# Altium PCB Route_Guide_and_Tuning.PcbDoc (part 1 of 8)
Units mil, origin at the board's own origin, x right, y up, seen from the top; angles counter-clockwise.
Board outline 3600 x 2300 mil, 14 copper layers (L1 TOP, L2_G, L3 SIG, L4_G, L4 SIG, L6_P, L7_G, L10_P, L11_P, L7 SIG, L13_P, L8 SIG, L15_G, L10 BOT), stack 89.291 mil thick; 4 components, 1934 nets, 2174 pads, 2165 vias.
Unrouted connection lines stored in the file: 123.
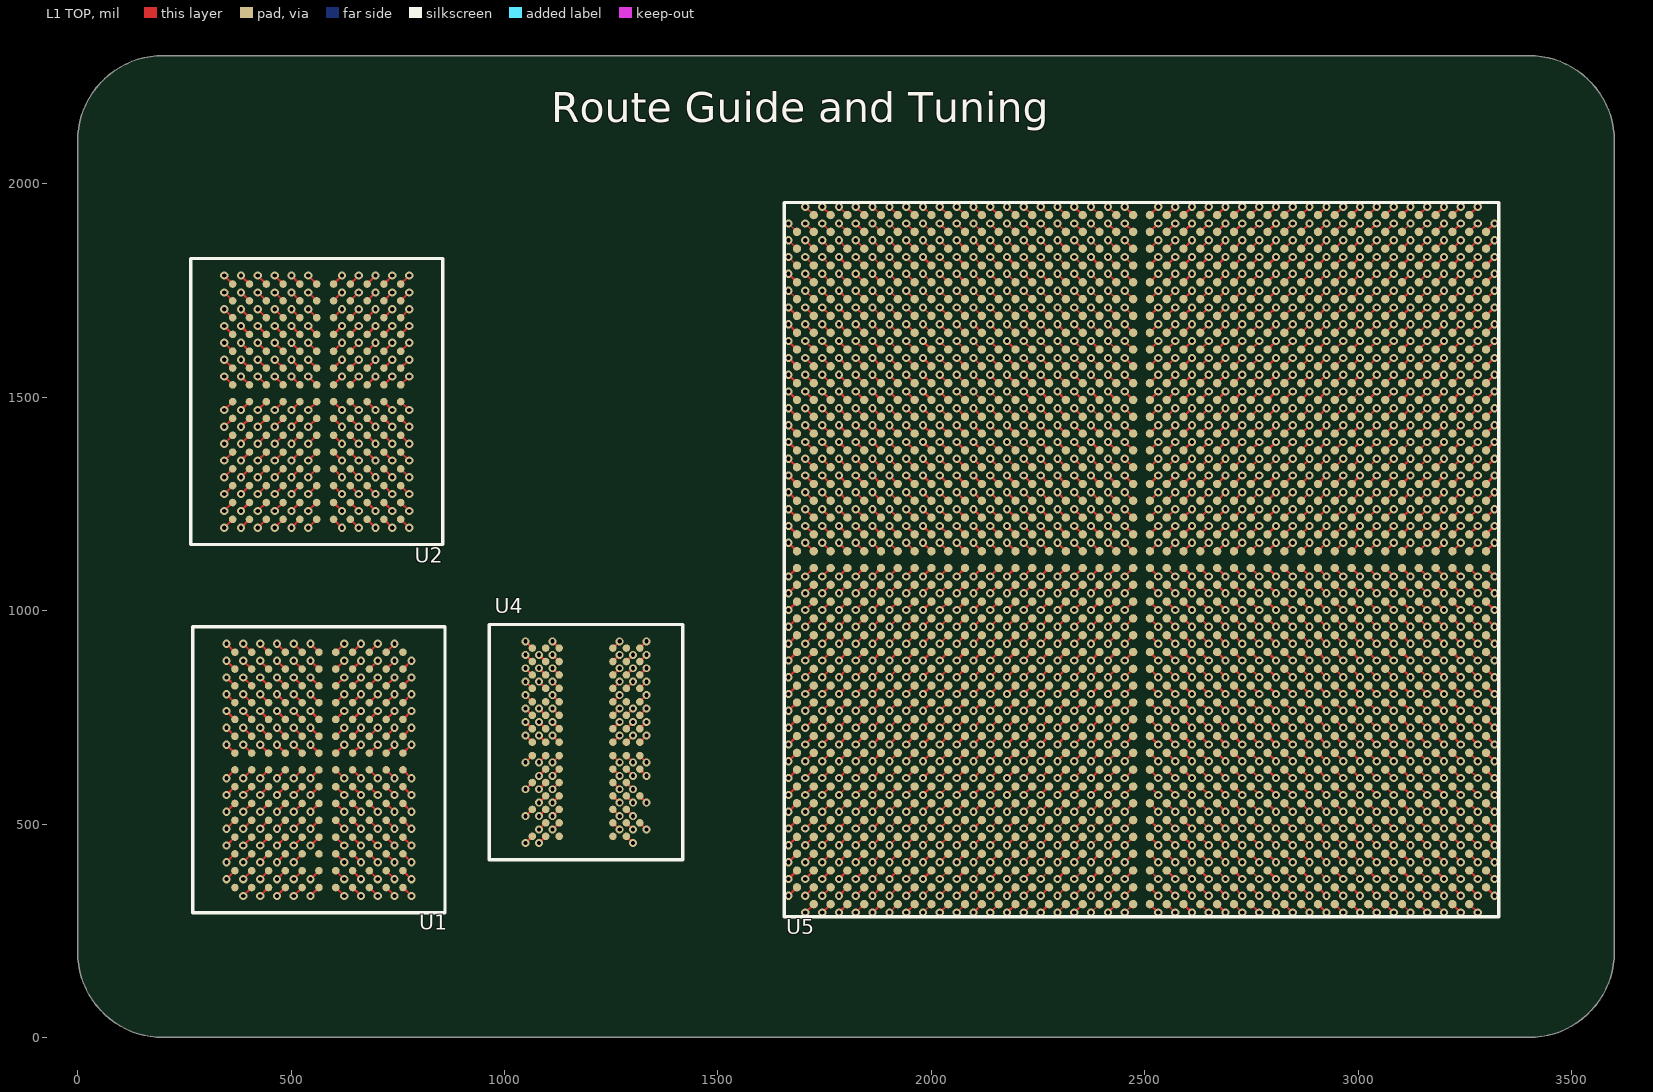
[diagram p0: L1 TOP view]
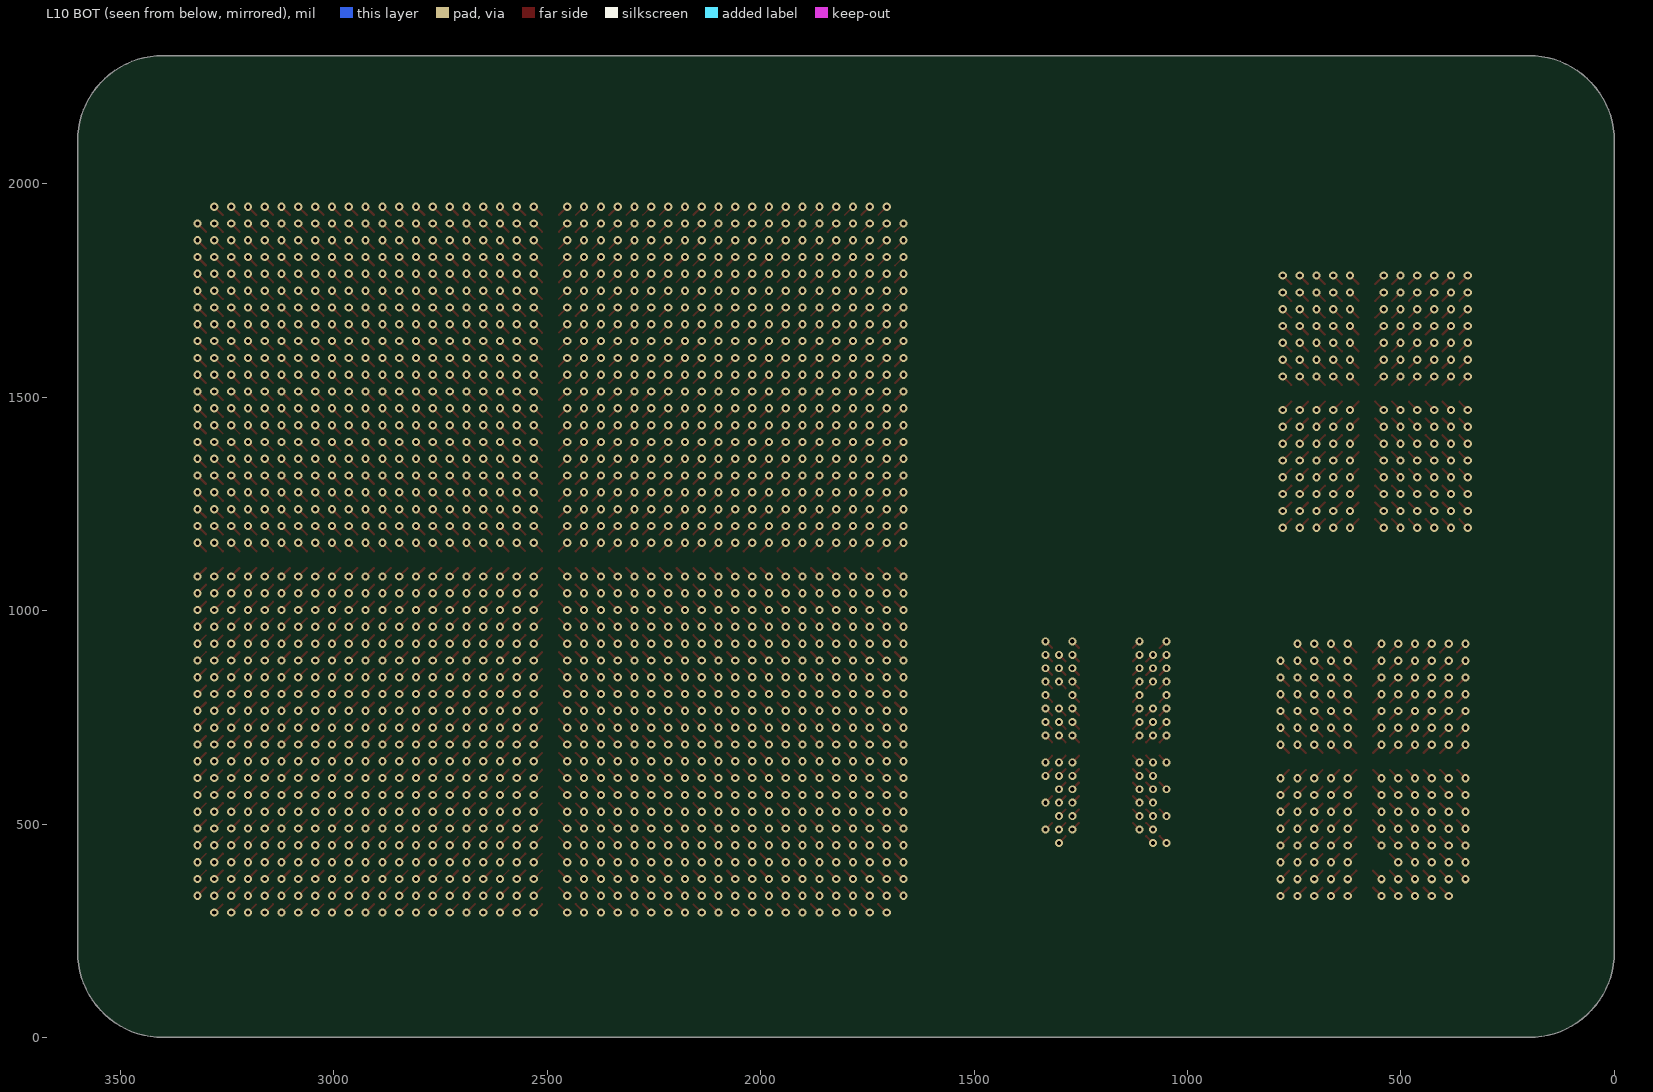
[diagram p1: L10 BOT view, seen from below]
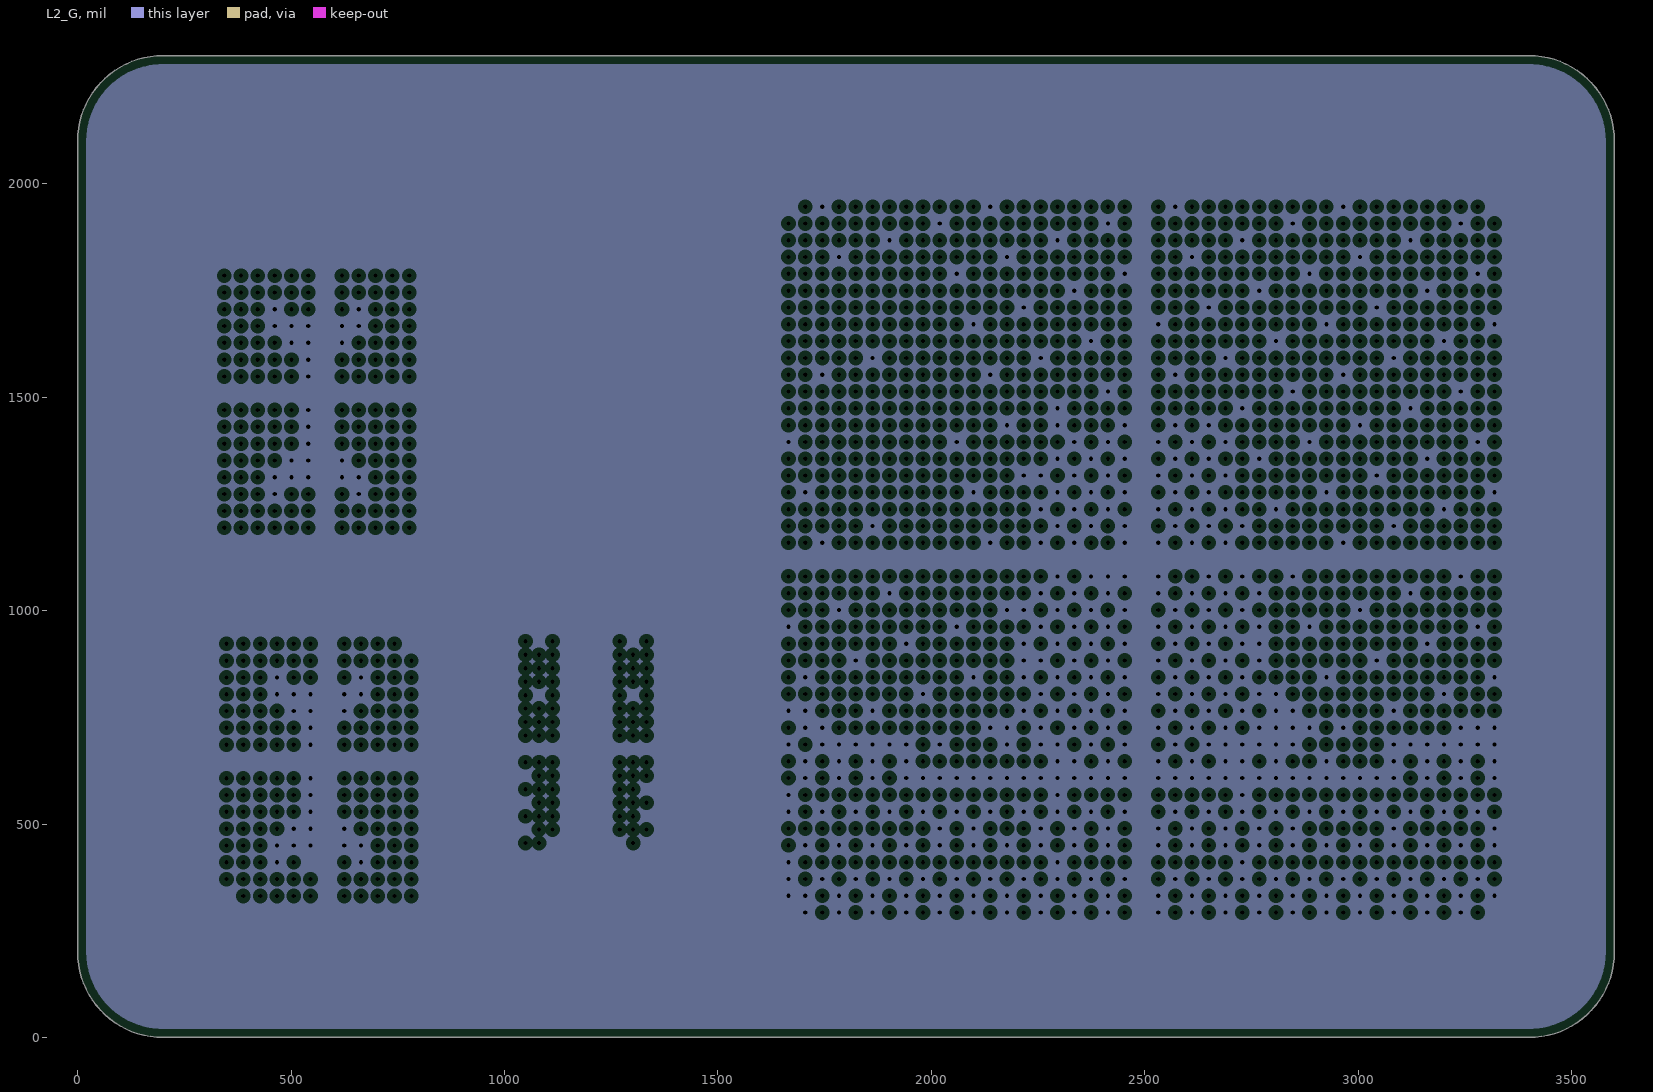
[diagram p2: L2_G, clearances drawn from the general rule]
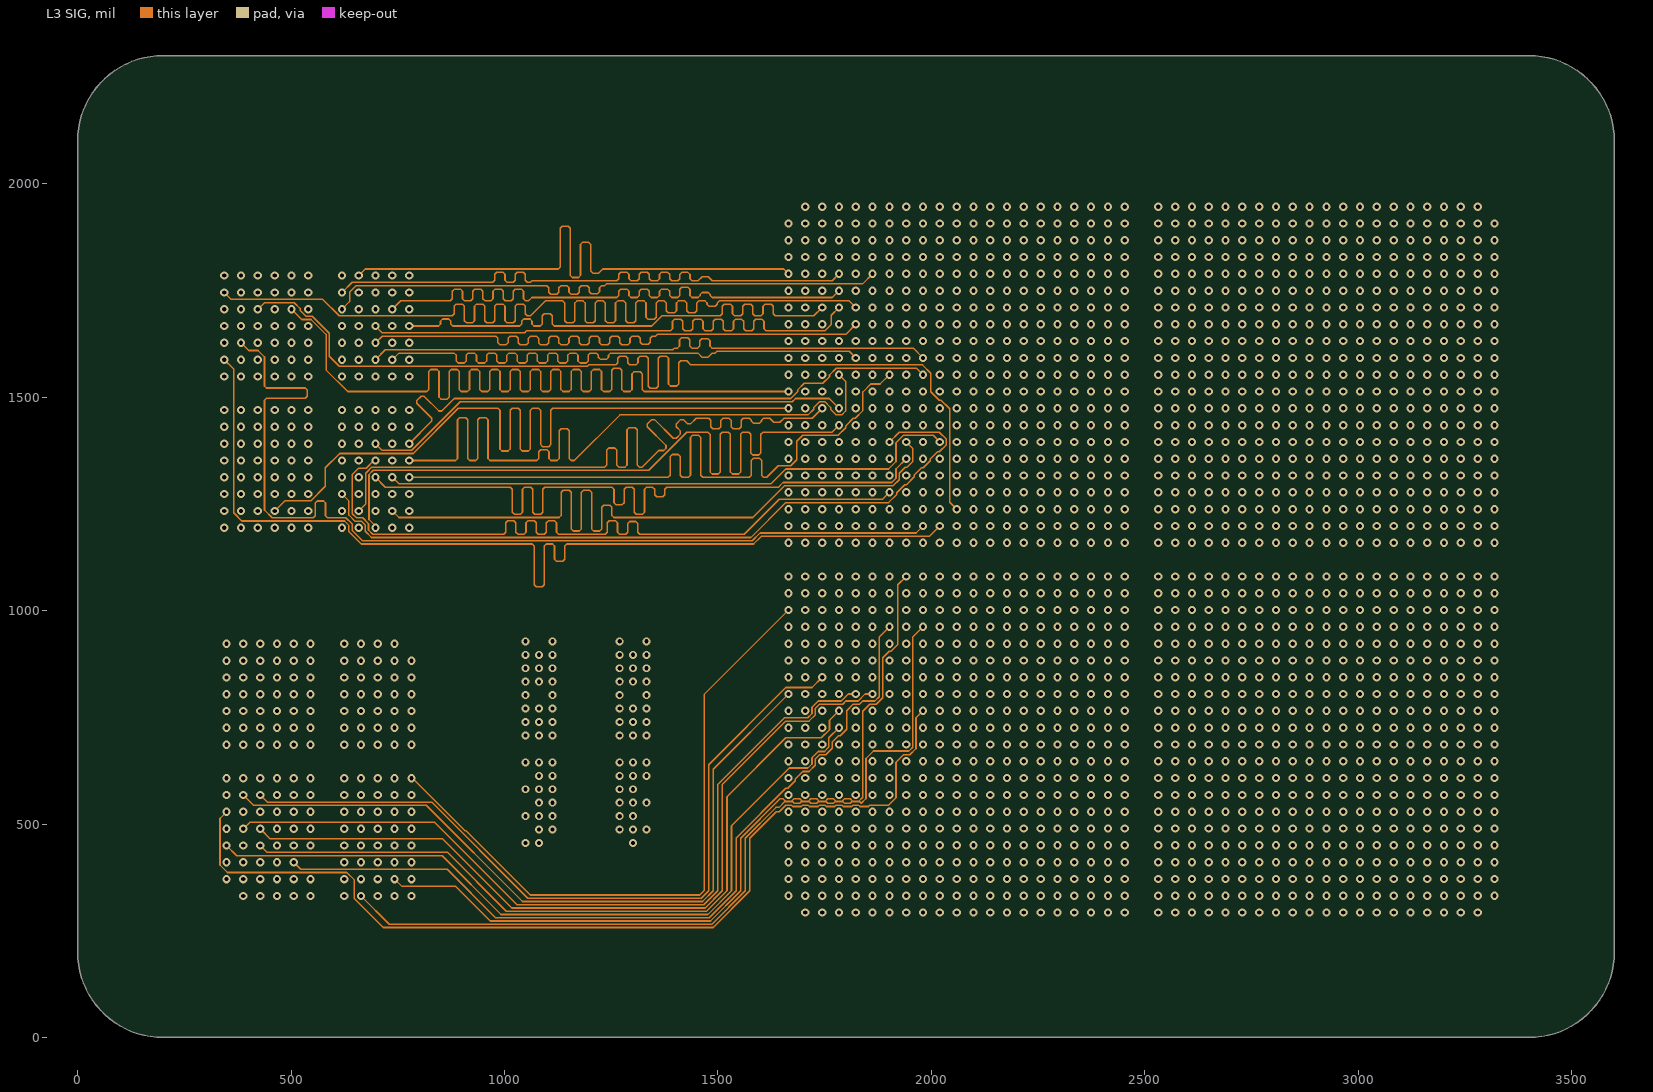
[diagram p3: L3 SIG]
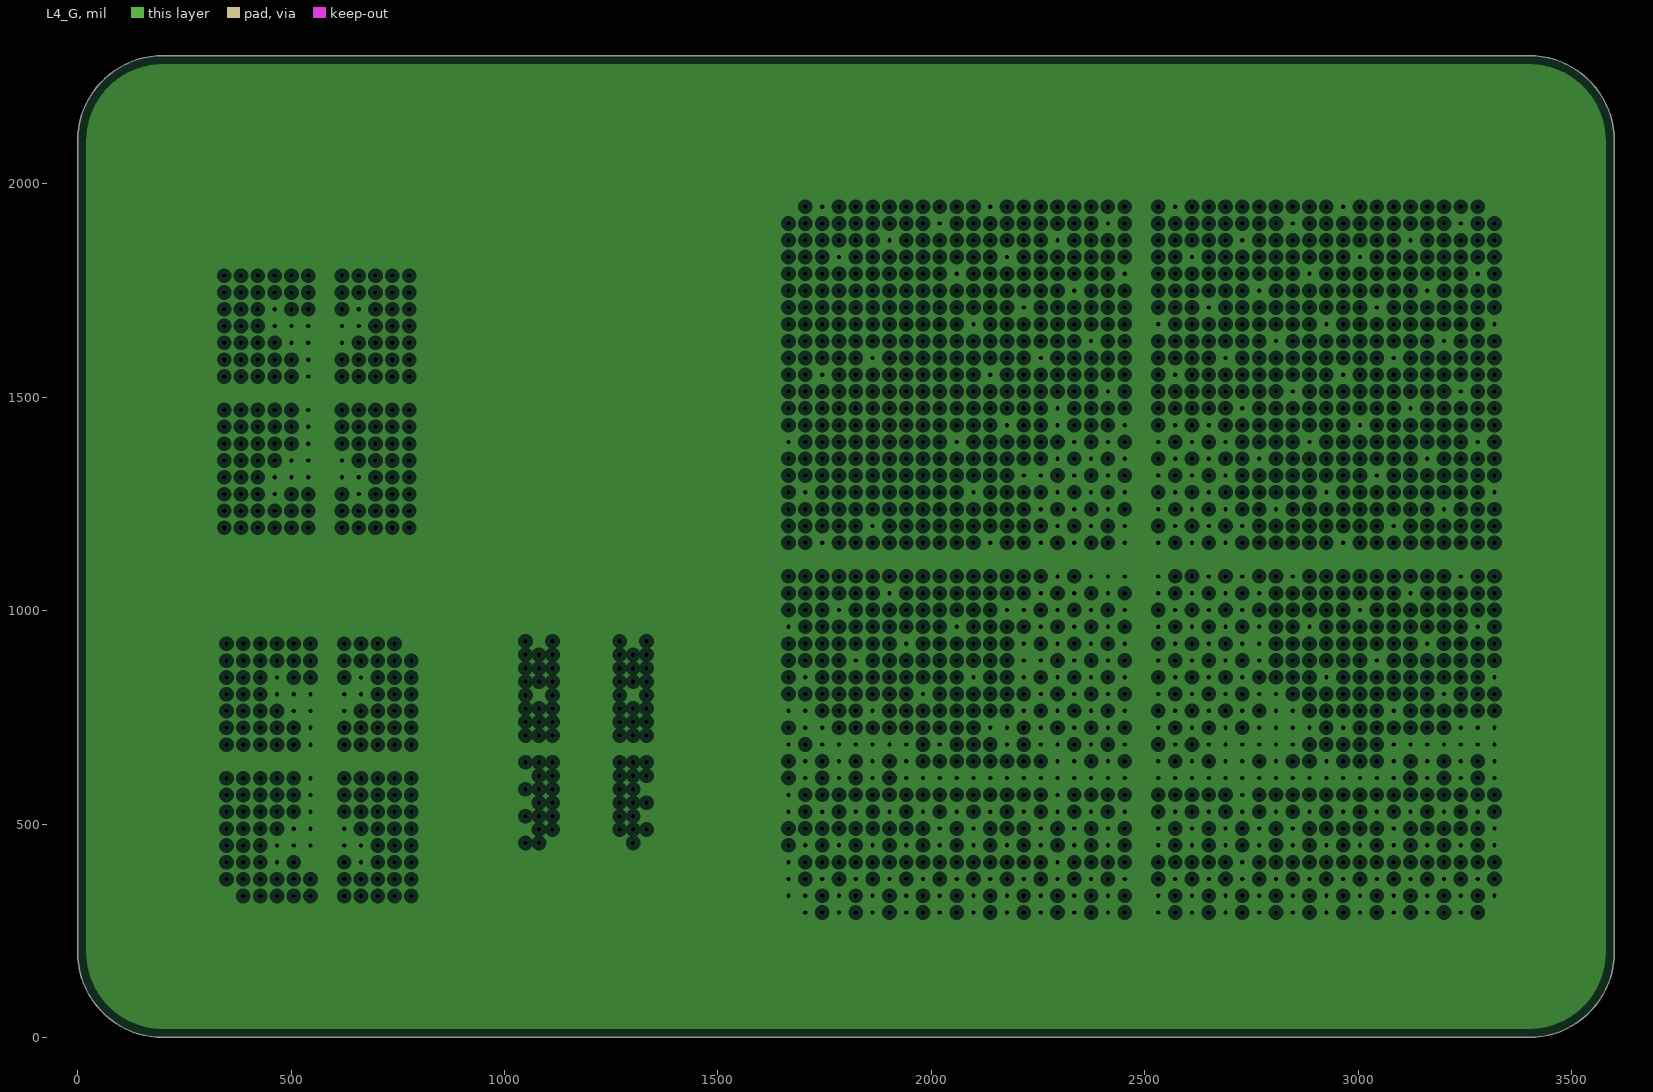
[diagram p4: L4_G, clearances drawn from the general rule]
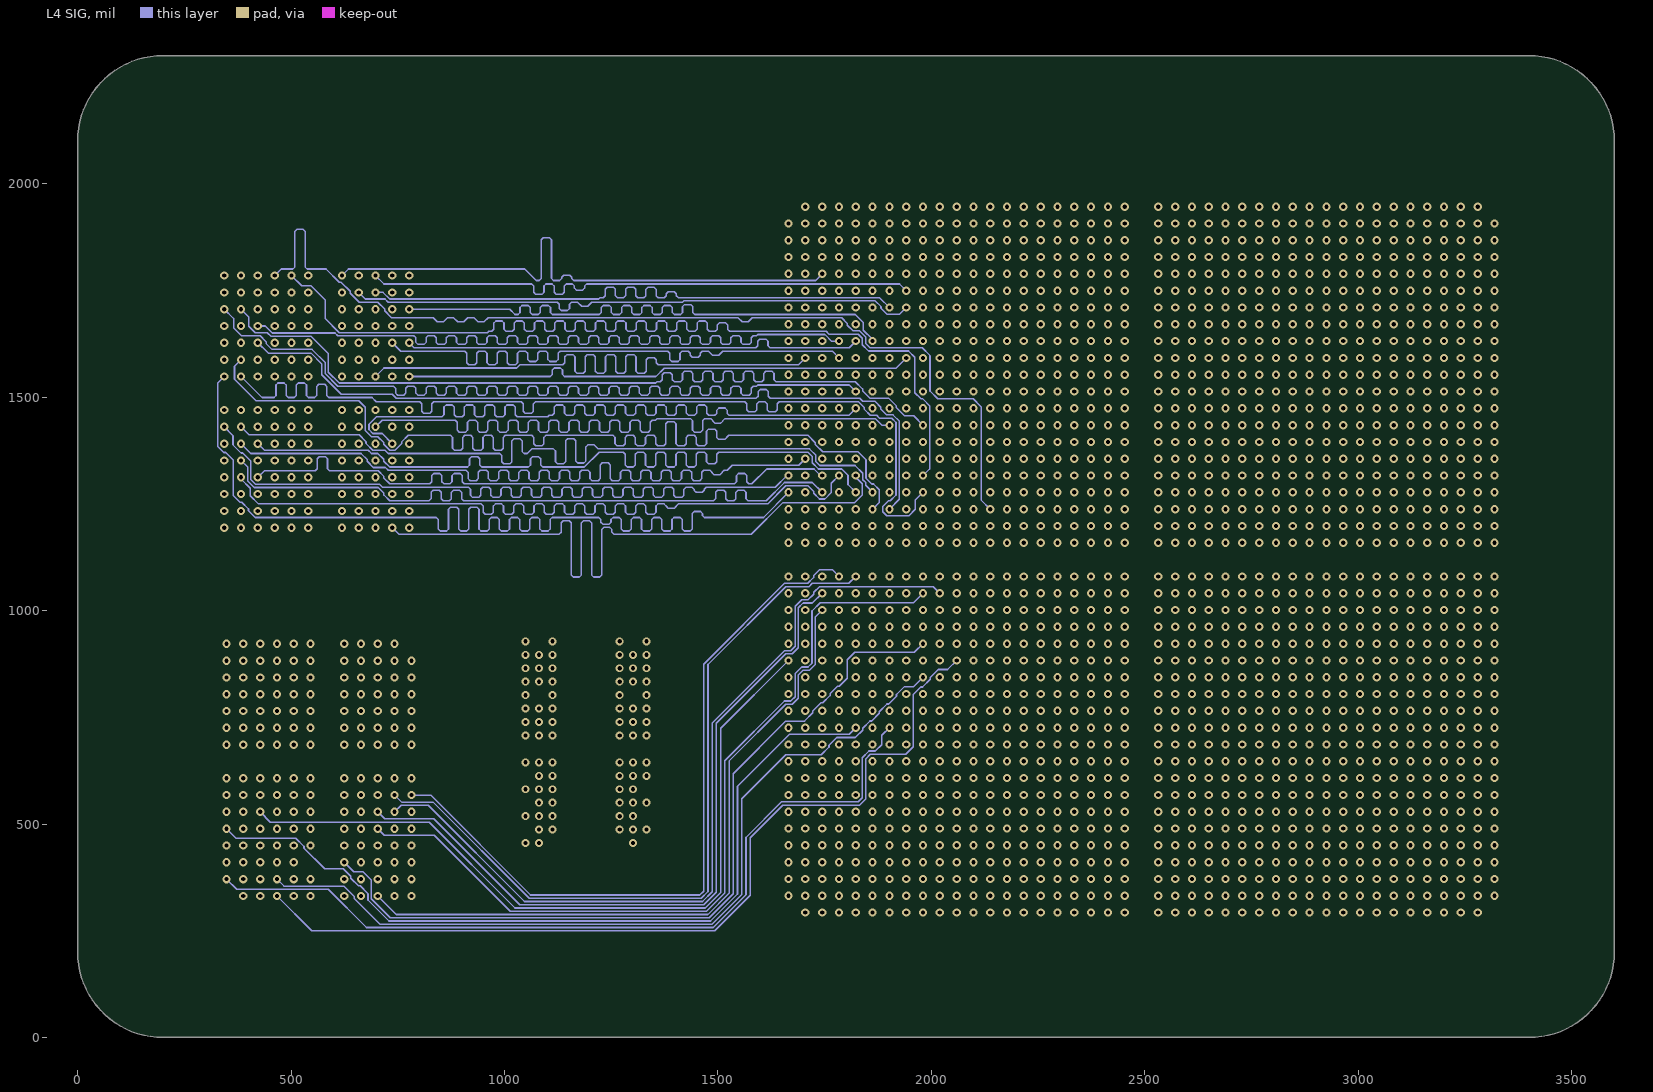
[diagram p5: L4 SIG]
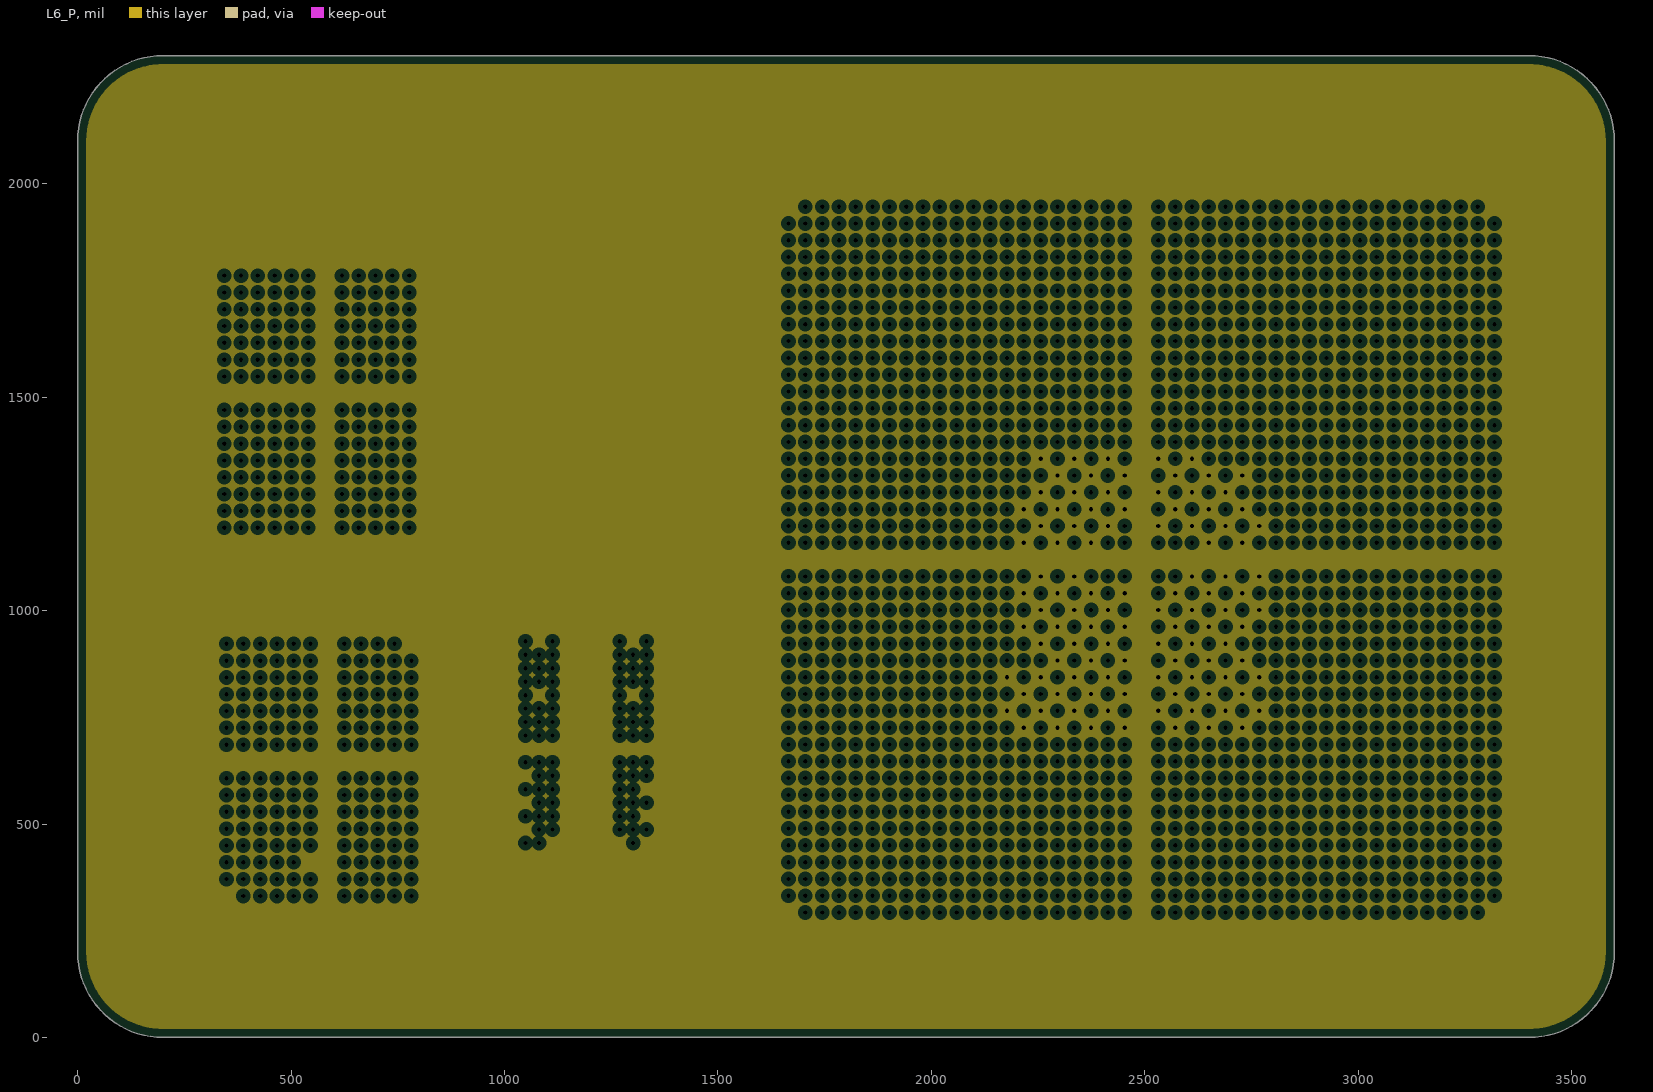
[diagram p6: L6_P, clearances drawn from the general rule]
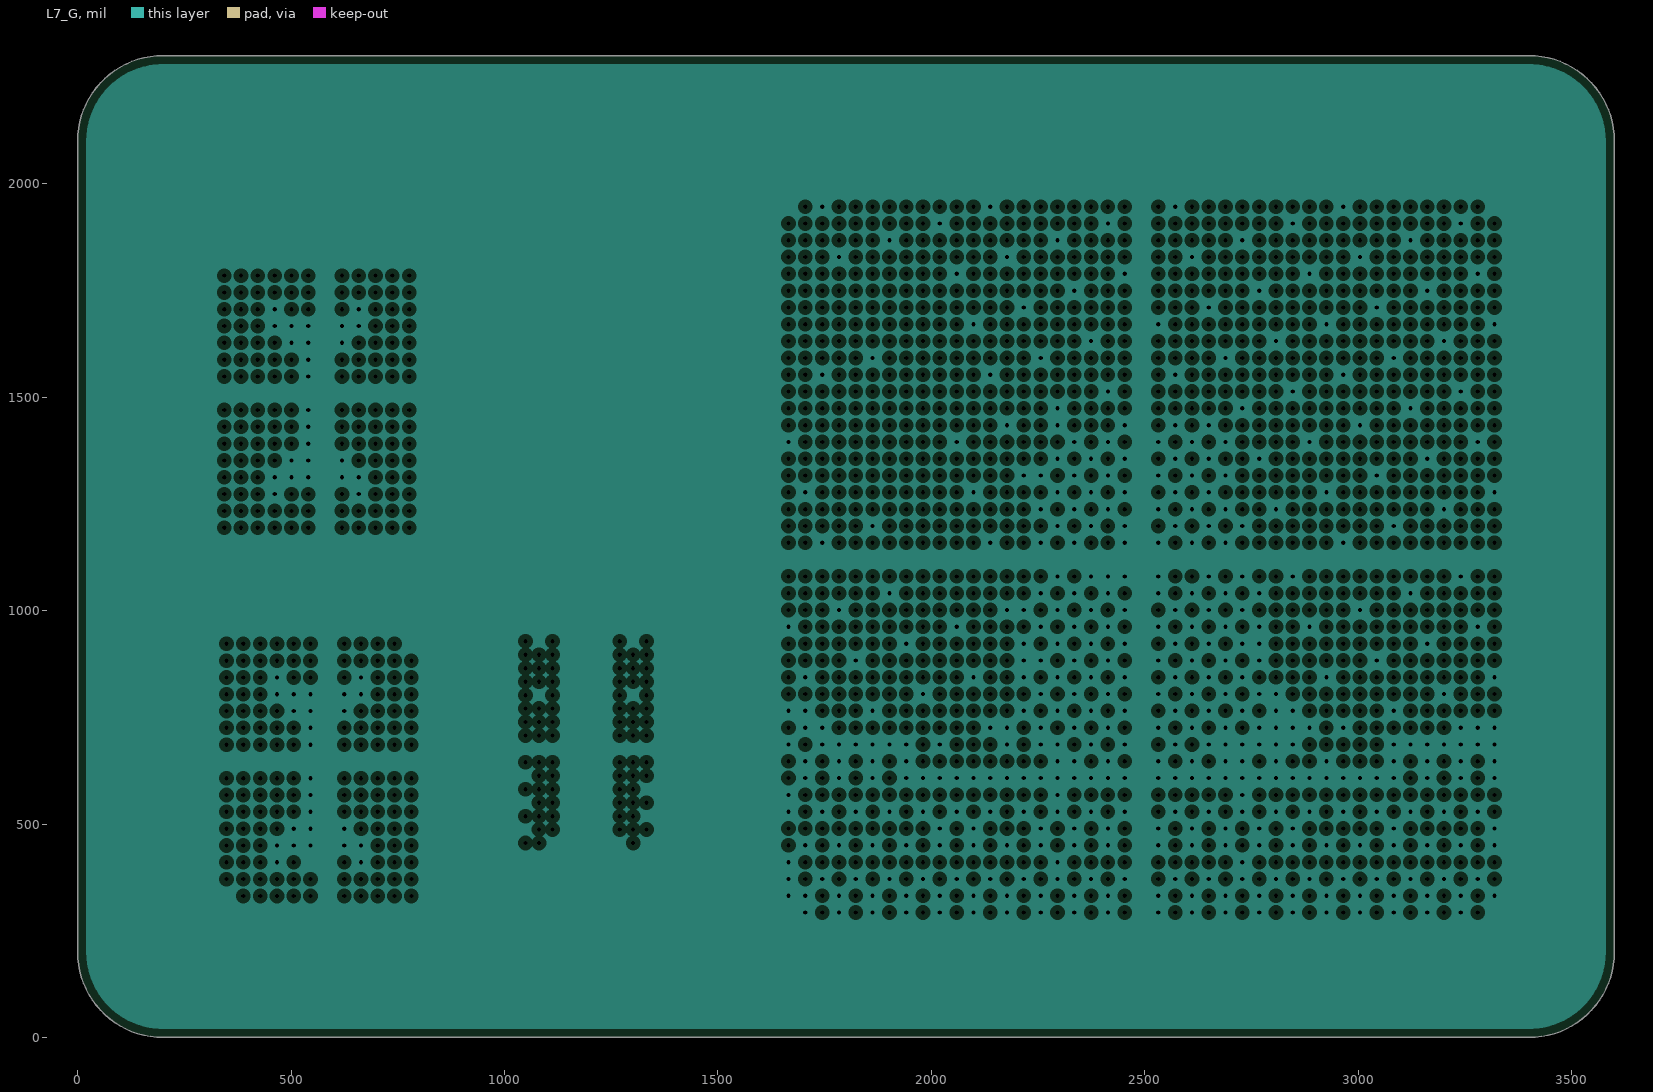
[diagram p7: L7_G, clearances drawn from the general rule]
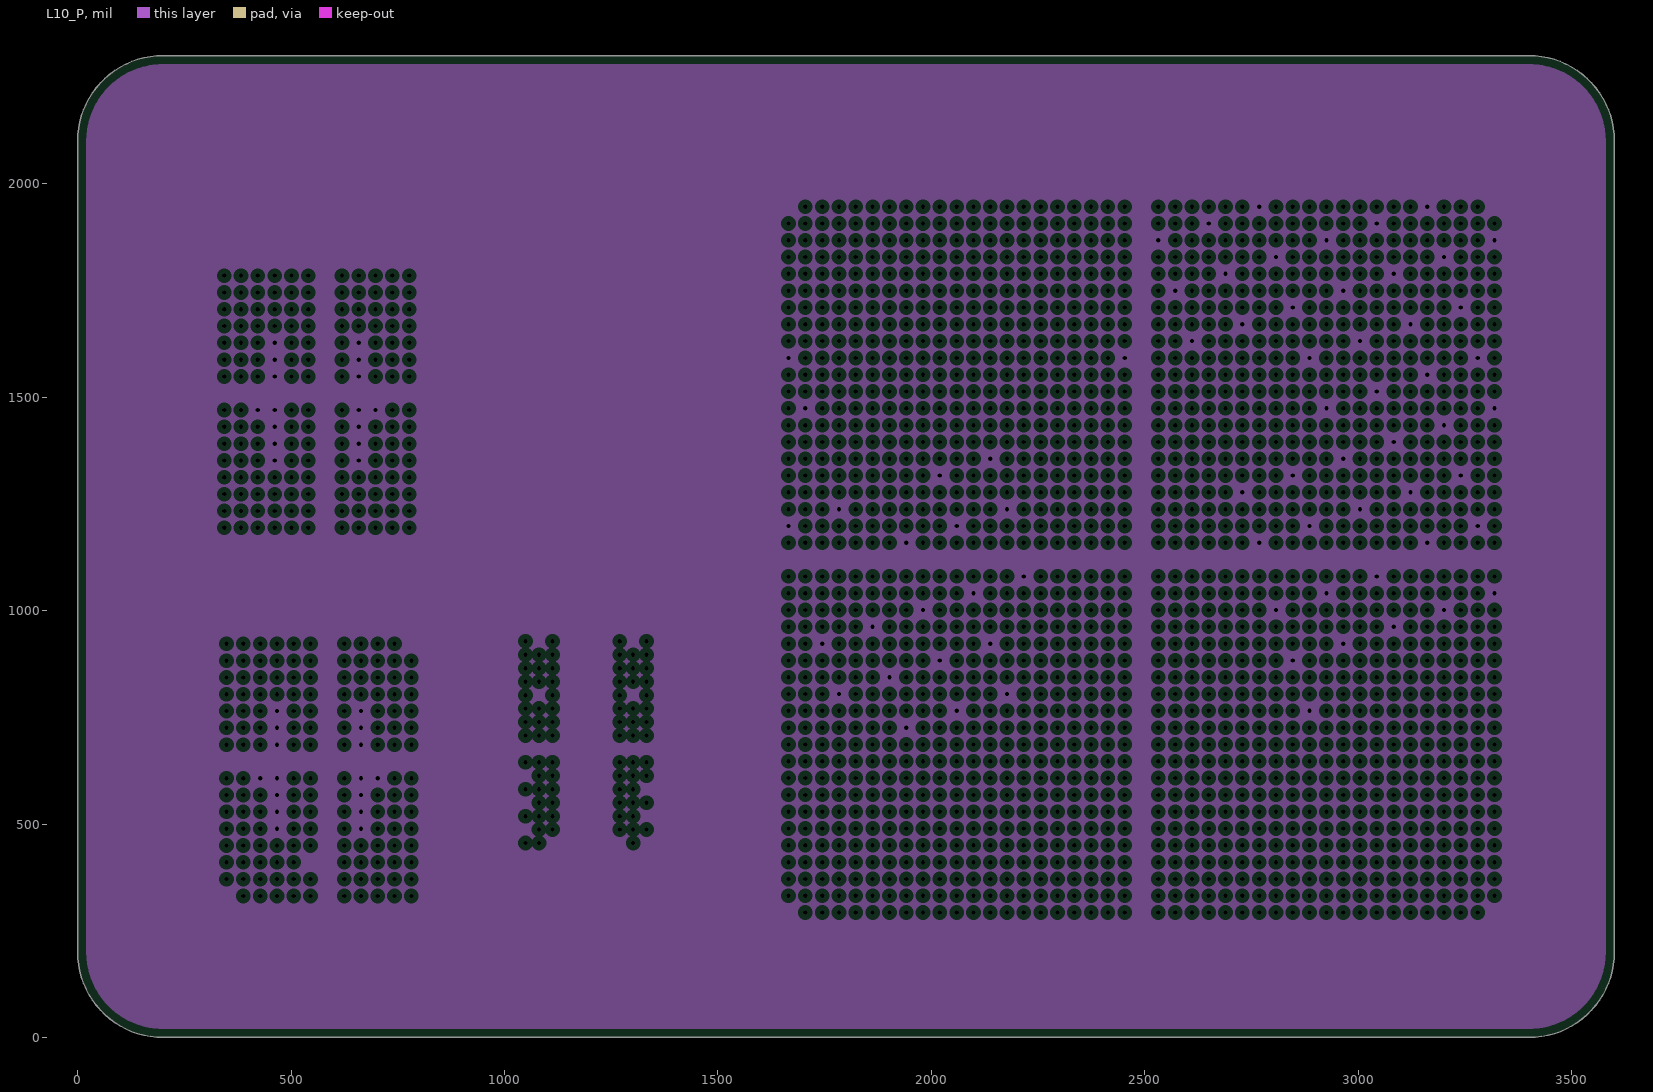
[diagram p8: L10_P, clearances drawn from the general rule]
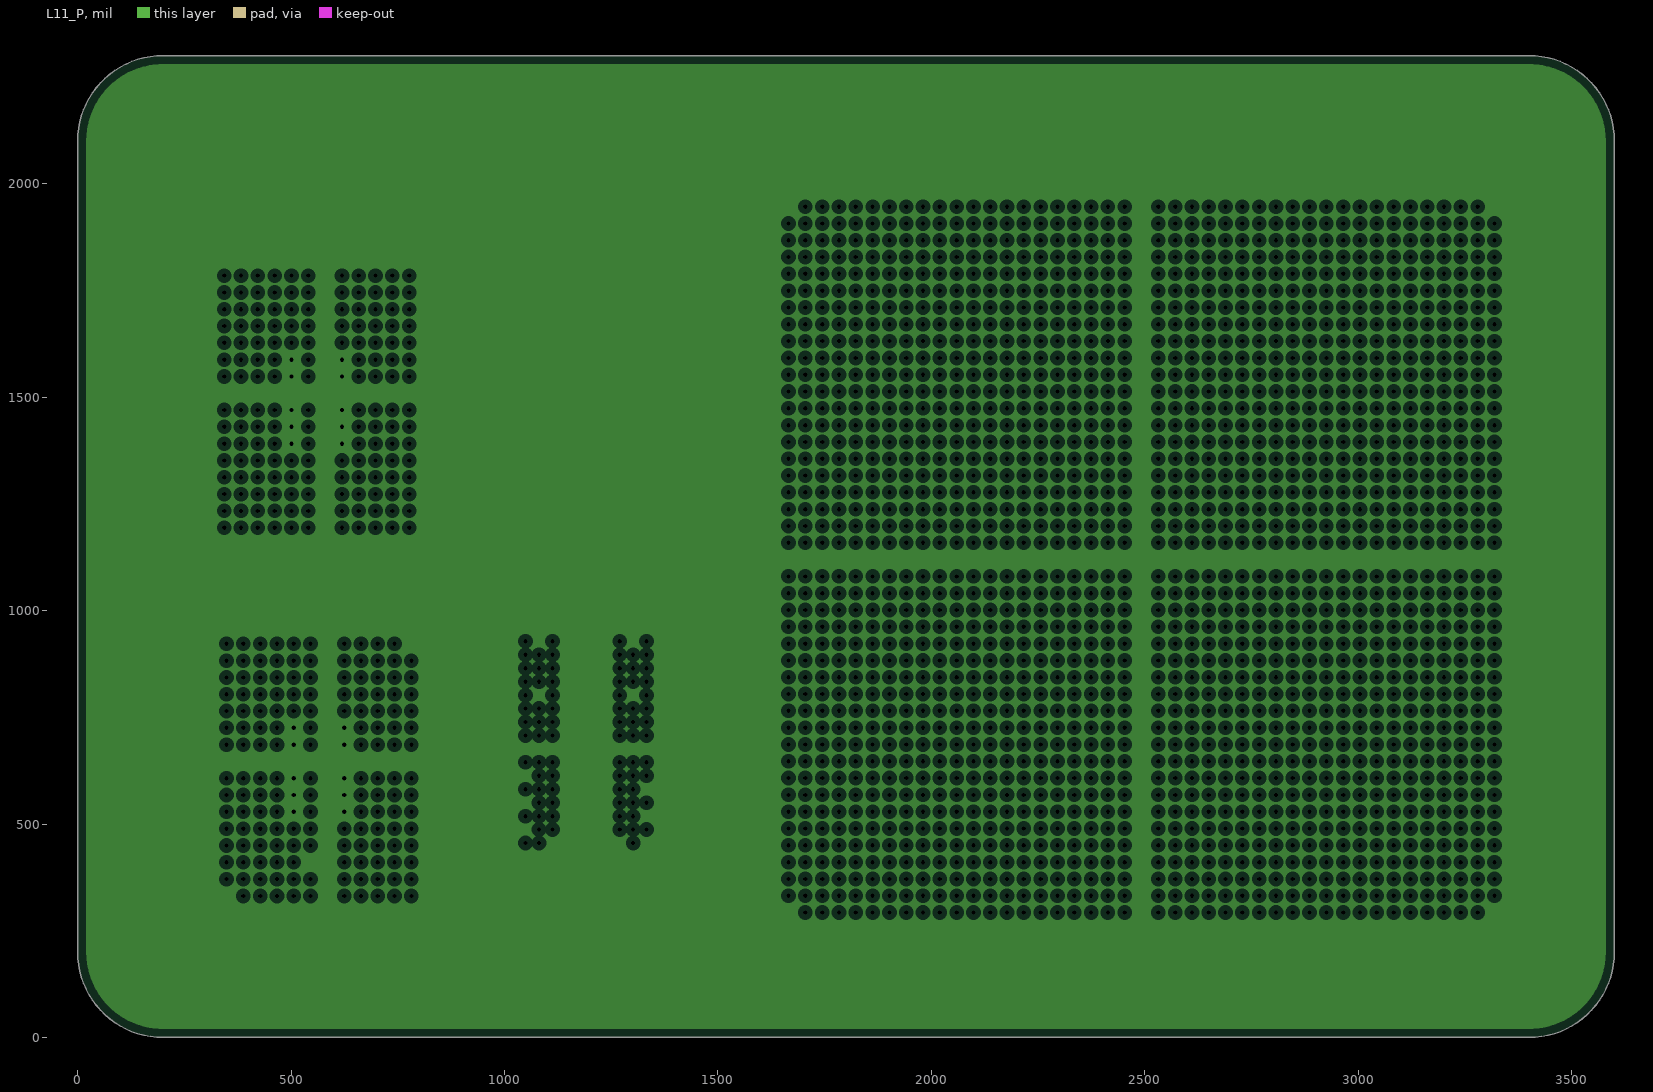
[diagram p9: L11_P, clearances drawn from the general rule]
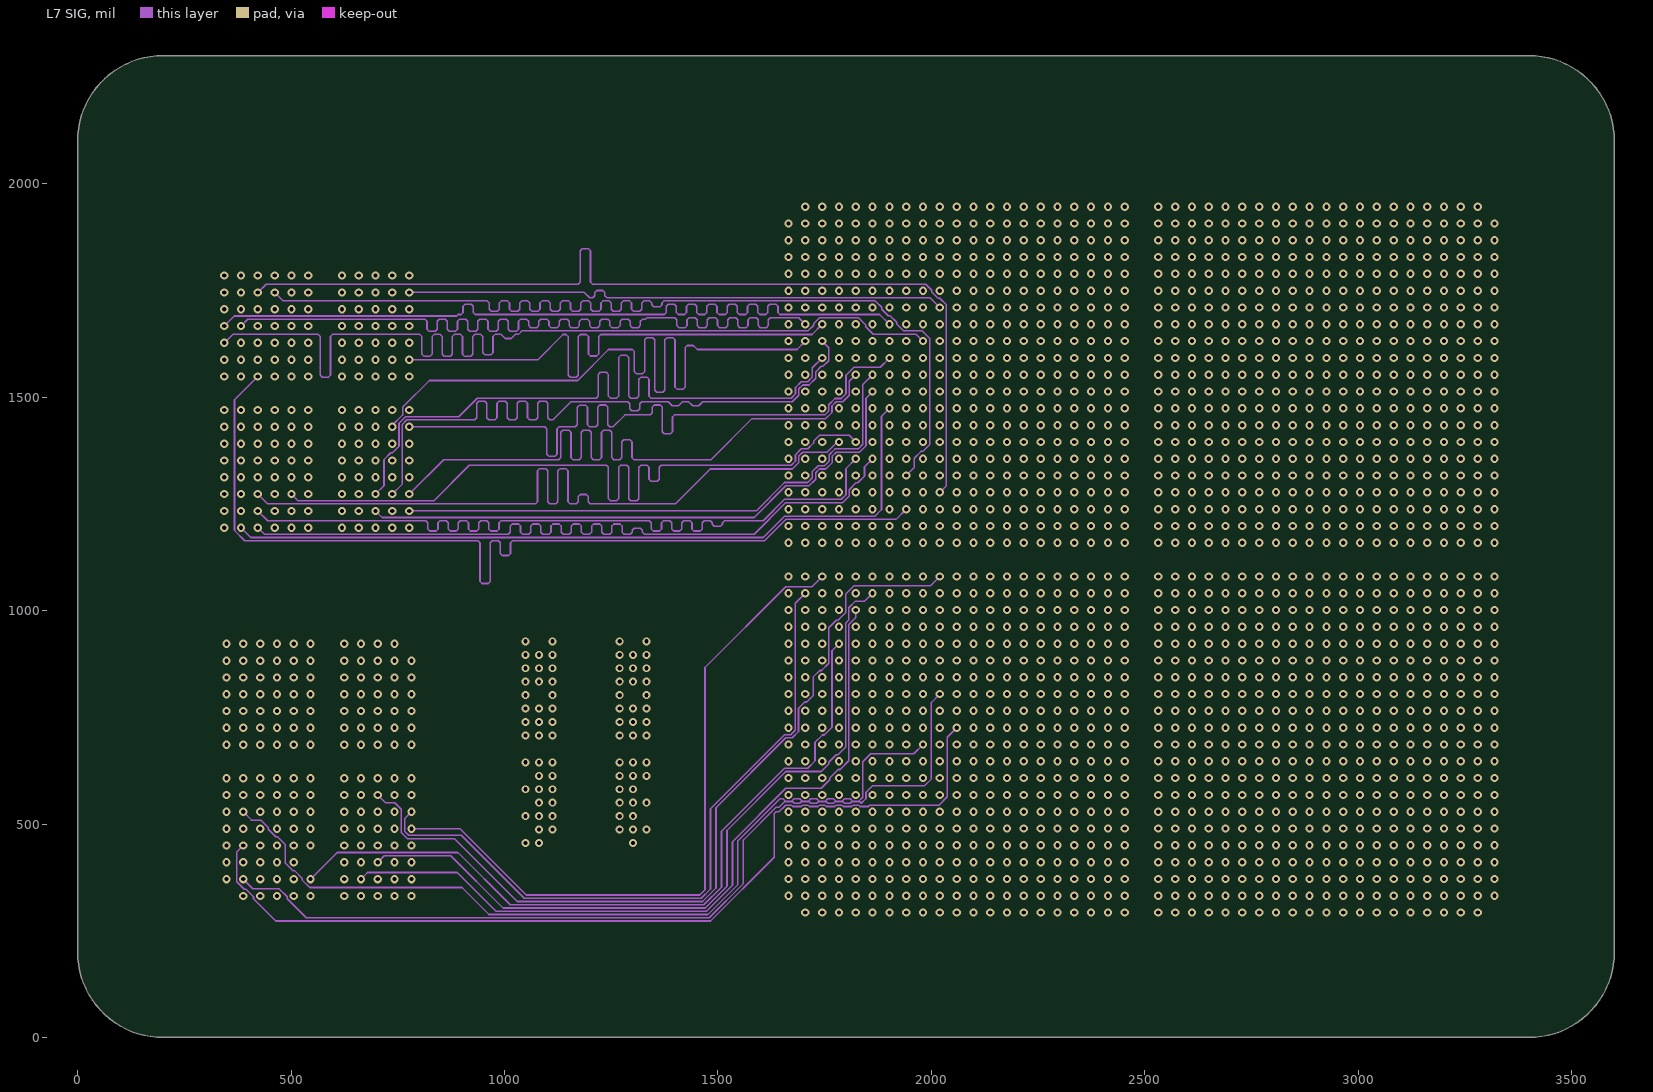
[diagram p10: L7 SIG]
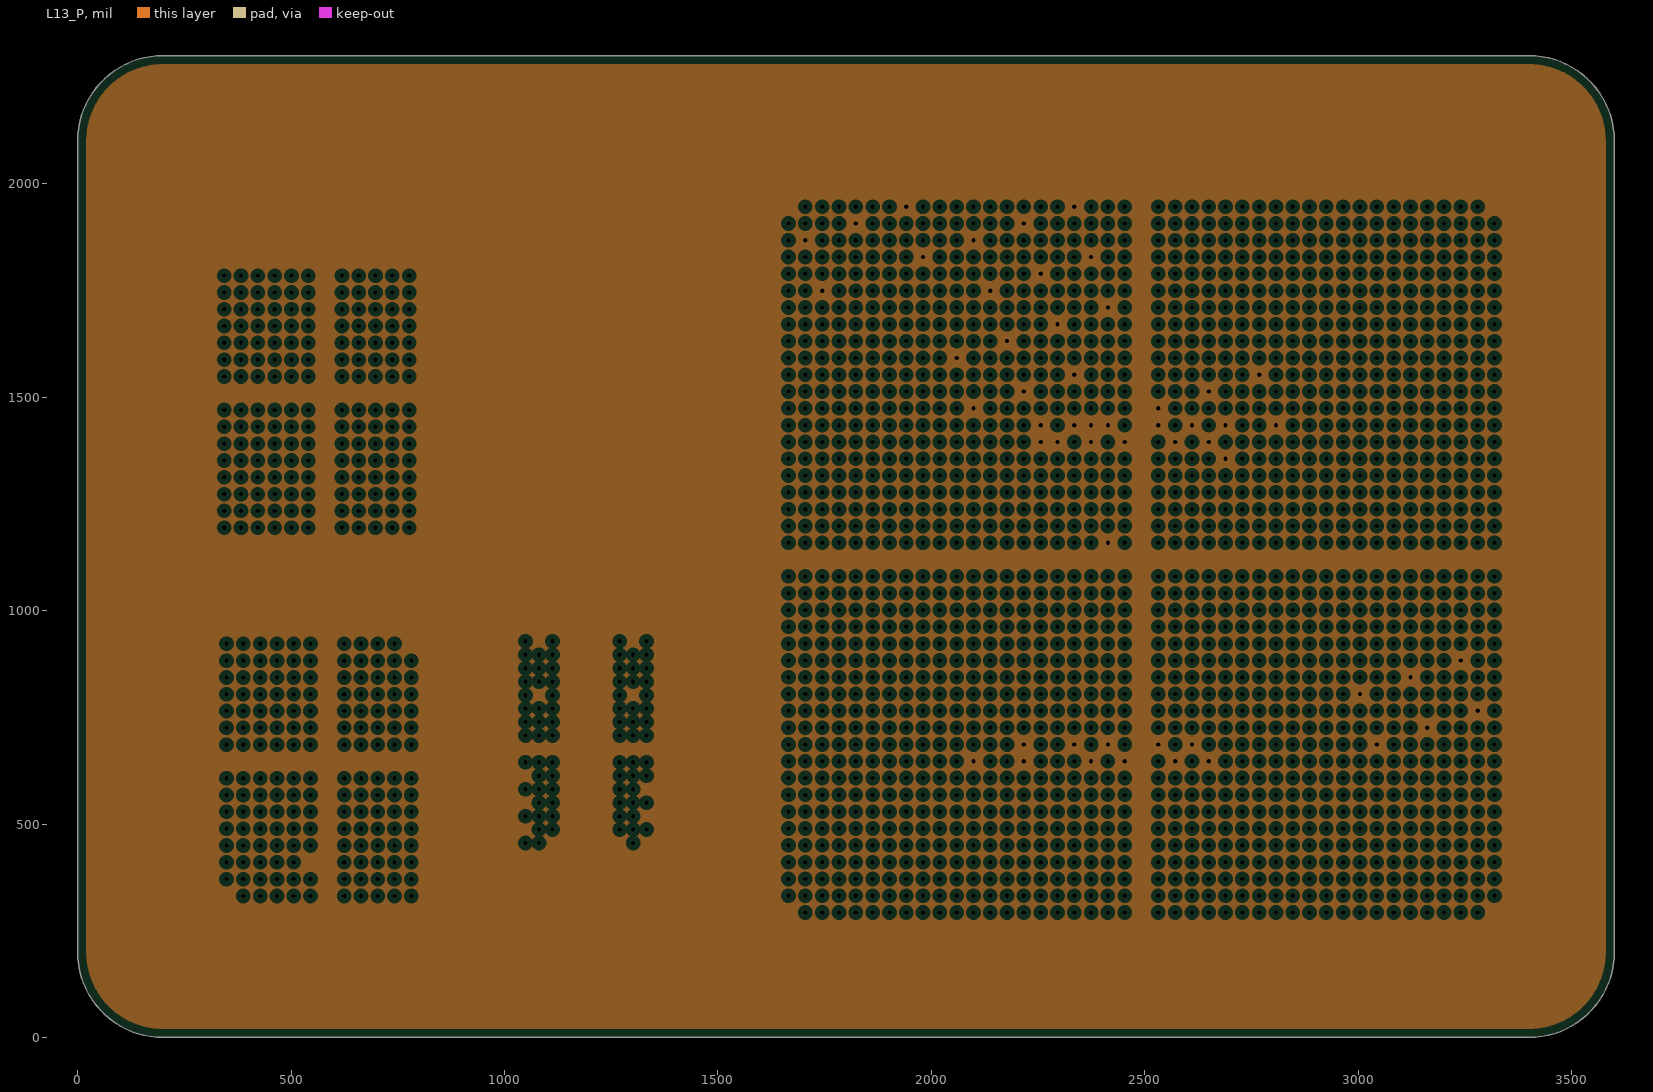
[diagram p11: L13_P, clearances drawn from the general rule]
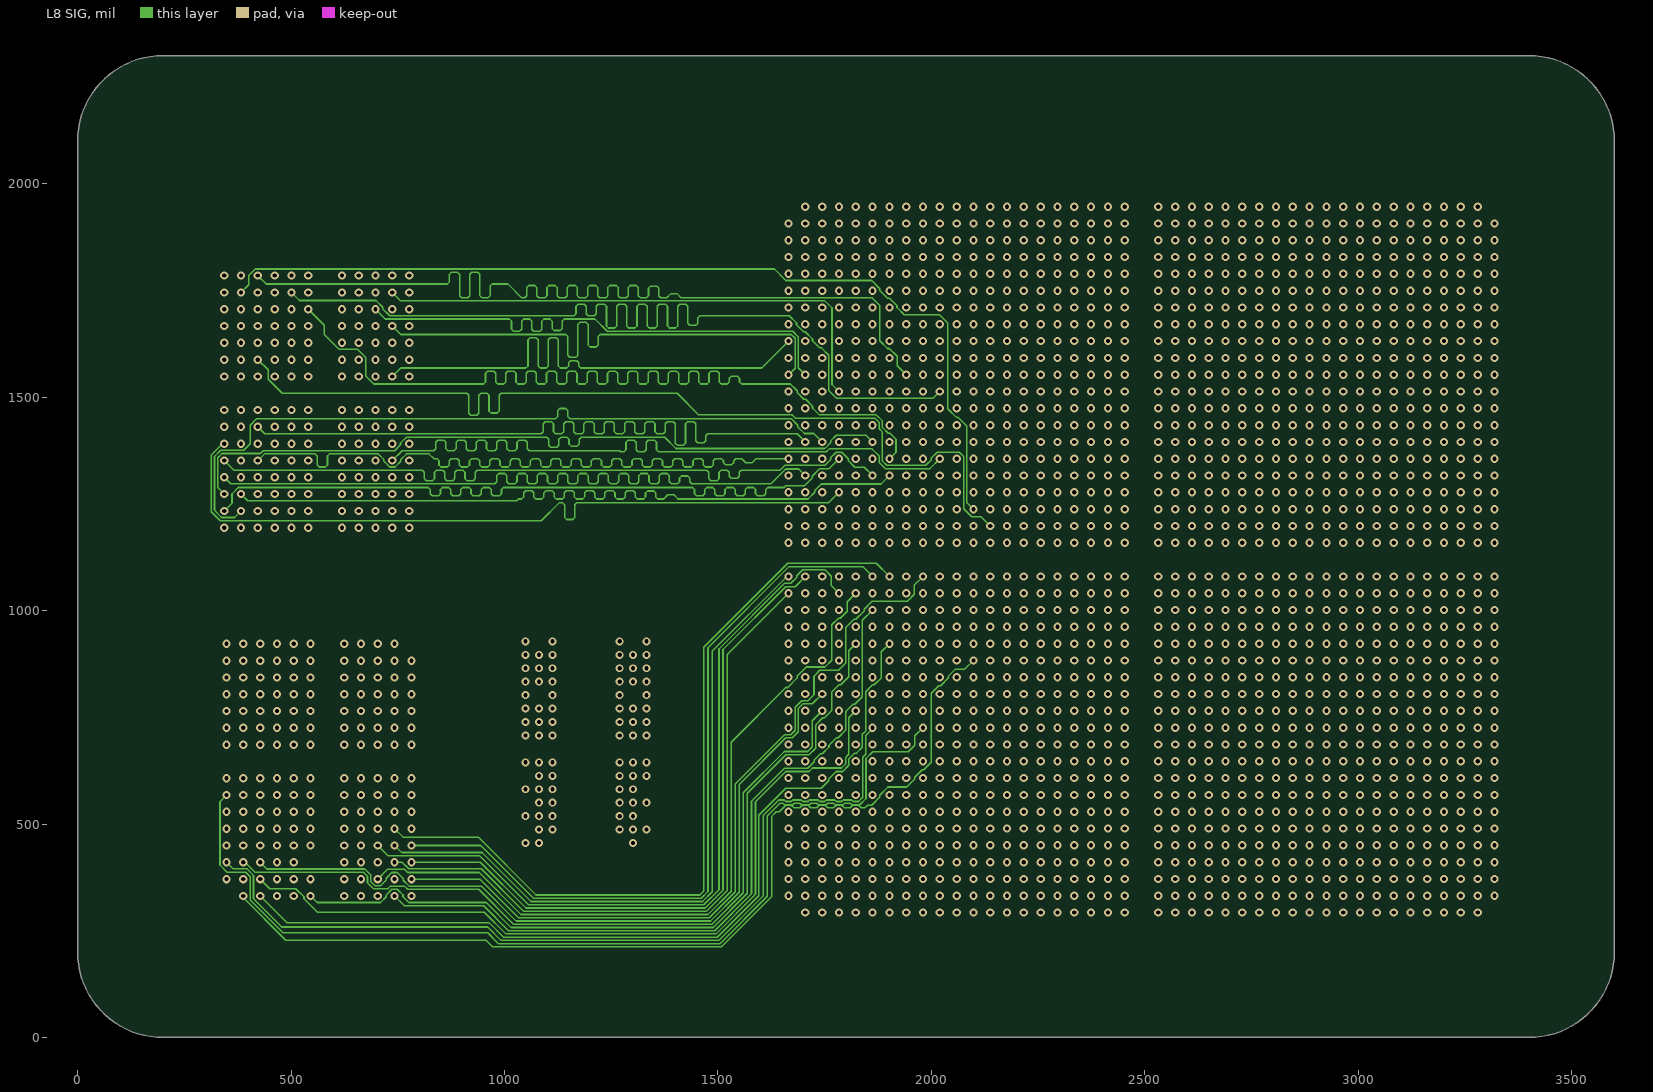
[diagram p12: L8 SIG]
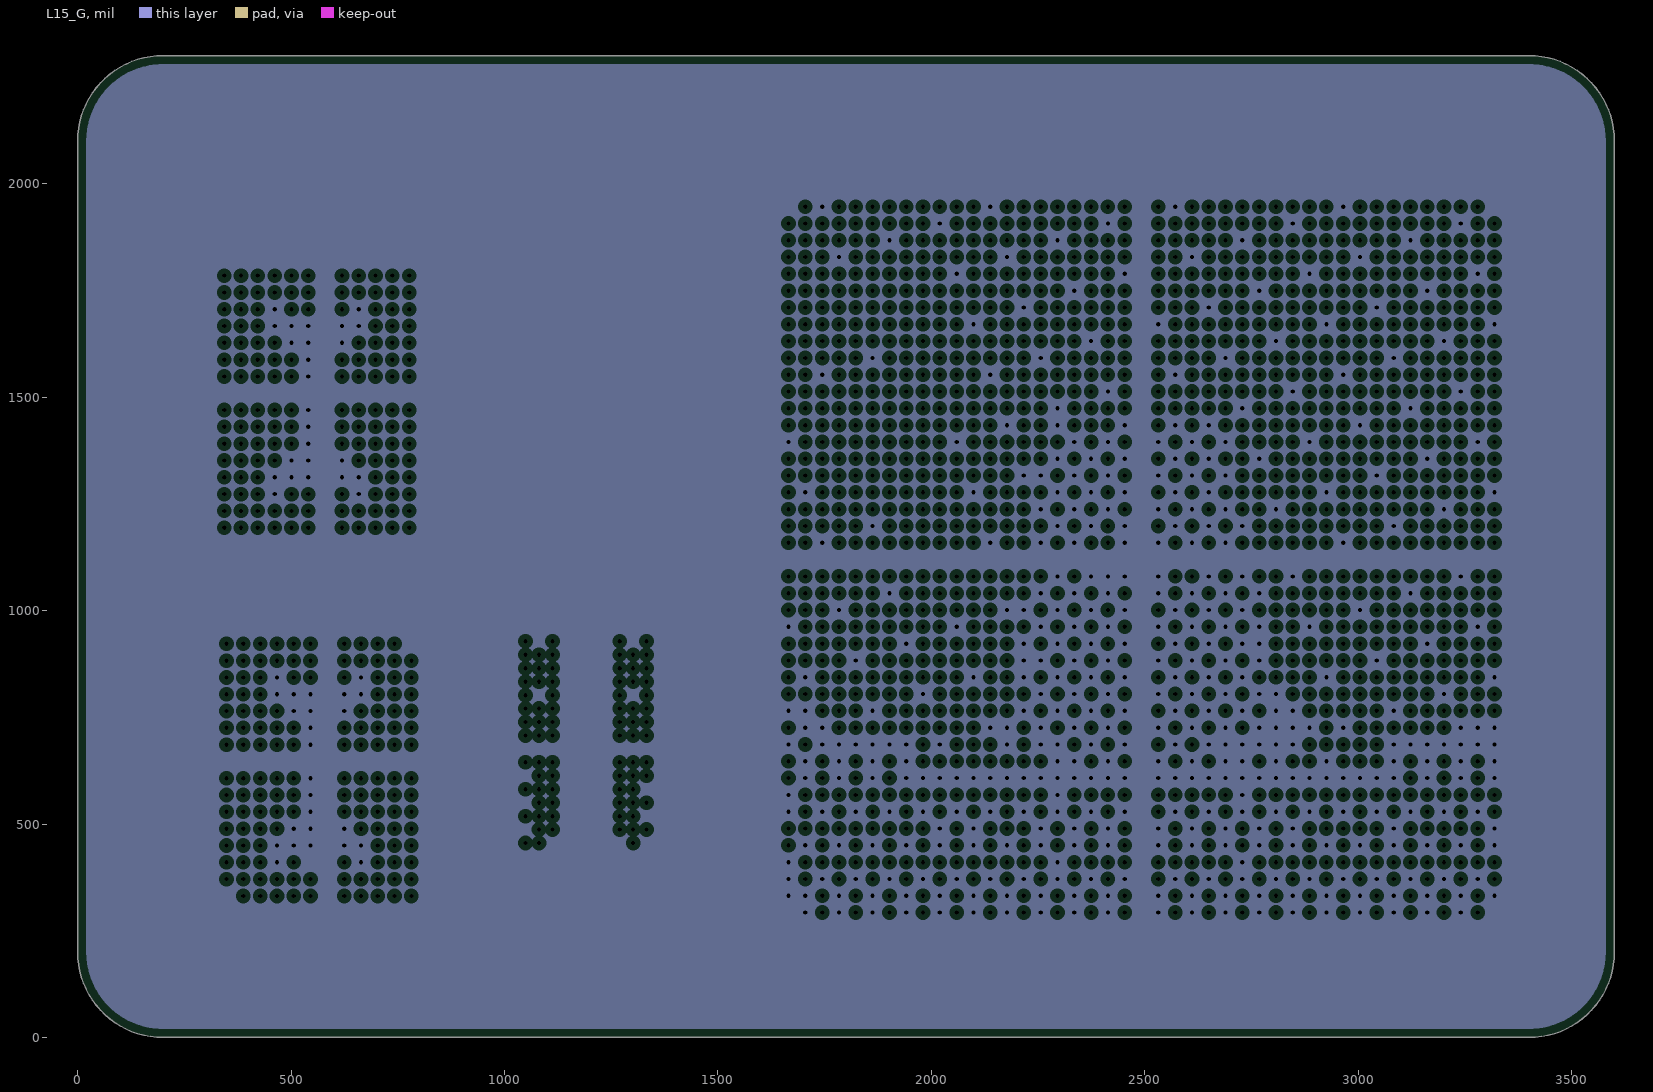
[diagram p13: L15_G, clearances drawn from the general rule]

## Layer stack, top to bottom
Top Solder: solder mask 0.4, Solder Resist, Dk 3.5
L1 TOP: signal copper 0.685
Dielectric1: prepreg 3, FR-4, Dk 4.2
L2_G: plane copper 0.6752, net GND
Dielectric9: core 5, FR-4, Dk 4.2
L3 SIG: signal copper 0.6752
Dielectric2: prepreg 5, FR-4, Dk 4.8
L4_G: plane copper 0.6752, net GND
Dielectric8: core 5, FR-4, Dk 4.2
L4 SIG: signal copper 0.6752
Dielectric3: prepreg 5, FR-4, Dk 4.2
L6_P: plane copper 1.3701, net 1V0
Dielectric10: core 5, FR-4, Dk 4.2
L7_G: plane copper 1.3701, net GND
Dielectric11: prepreg 4, FR-4, Dk 4.2
L10_P: plane copper 1.3701, net 1V5
Dielectric12: core 10, FR-4, Dk 4.2
L11_P: plane copper 1.3701, net 1V8
Dielectric13: prepreg 5, FR-4, Dk 4.2
L7 SIG: signal copper 0.685
Dielectric6: core 10, FR-4, Dk 4.2
L13_P: plane copper 0.685, net 2V5
Dielectric14: prepreg 5, FR-4, Dk 4.2
L8 SIG: signal copper 0.685
Dielectric7: core 10, FR-4, Dk 4.2
L15_G: plane copper 0.685, net GND
Dielectric15: prepreg 5, FR-4, Dk 4.2
L10 BOT: signal copper 0.685
Bottom Solder: solder mask 0.4, Solder Resist, Dk 3.5

## Board outline
3600,200 3600,2100 ccw(c3400,2100) 3400,2300 200,2300 ccw(c200,2100) 0,2100 0,200 ccw(c200,200) 200,0 3400,0 ccw(c3400,200)

## Design rules (kind name [scope] priority, off if disabled: settings)
AcuteAngle [not isarc] p1: minimum=6.00000000000000E+0001 checktracksonly=FALSE
Clearance Clearance_3.8 [All] p1: gap=3.8 ignorepadtopadclearanceinfootprint=TRUE except(0: Arc-Hole Track-Hole SMDPad-Hole THPad-Hole Via-Hole Fill-Hole Poly-Hole Region-Hole Text-Hole)
DiffPairsRouting [All] p1: maxlimit=10 minlimit=4 mostfreqgap=4 toplayer_minwidth=3.8 toplayer_maxwidth=10 toplayer_prefwidth=3.8 midlayer3_minwidth=3.8 midlayer3_maxwidth=10 midlayer3_prefwidth=3.8 midlayer4_minwidth=3.8 midlayer4_maxwidth=10 midlayer4_prefwidth=3.8 midlayer7_minwidth=3.8 midlayer7_maxwidth=10 midlayer7_prefwidth=3.8 midlayer8_minwidth=3.8 midlayer8_maxwidth=10 midlayer8_prefwidth=3.8 bottomlayer_minwidth=3.8 bottomlayer_maxwidth=10 bottomlayer_prefwidth=3.8 maxuncoupledlength=700
FanoutControl Fanout_Default [All] p5: bgadir=Out bgaviamode=Centered fanoutstyle=BGA fanoutdirection=Alternating viagrid=1 // Fanout_Default (Default Rule)
Height [All] p1: minheight=0 maxheight=1181.1 prefheight=500
HoleSize [All] p1: absolutevalues=TRUE maxlimit=150 minlimit=10 maxpercent=80.000 minpercent=20.000
MatchedLengths MatchedLengths_4 [InNetClass('Net Class 4')] p1: tolerance=50 checknetsindiffpair=FALSE checkdiffpairvsdiffpair=TRUE checkxsignals=TRUE checkothers=TRUE
MatchedLengths MatchedLengths_3 [InNetClass('Net Class 3')] p2: tolerance=50 checknetsindiffpair=FALSE checkdiffpairvsdiffpair=TRUE checkxsignals=TRUE checkothers=TRUE
MatchedLengths MatchedLengths_2 [InNetClass('Net Class 2')] p3: tolerance=50 checknetsindiffpair=FALSE checkdiffpairvsdiffpair=TRUE checkxsignals=TRUE checkothers=TRUE
MatchedLengths MatchedLengths_1 [InNetClass('Net Class 1')] p4: tolerance=50 checknetsindiffpair=FALSE checkdiffpairvsdiffpair=TRUE checkxsignals=TRUE checkothers=TRUE
MinimumAnnularRing [All] p1: minimumring=4.05
MinimumSolderMaskSliver [All] p1: minsoldermaskwidth=2
PlaneClearance PlaneClearance_routingvia [All] p1: clearance=12.2
PlaneConnect PlaneConnect_via [(not InPadClass('All Pads'))] p1: planeconnectstyle=Direct reliefexpansion=20 reliefentries=4 reliefconductorwidth=10 reliefairgap=10
PlaneConnect PlaneConnect_component [(InPadClass('All Pads'))] p2: planeconnectstyle=Relief reliefexpansion=20 reliefentries=4 reliefconductorwidth=15 reliefairgap=10
PolygonConnect PolygonConnect_rpack [(HasFootprint('RESCAV50P100X200X45-8L'))] p1: connectstyle=Relief reliefconductorwidth=10 reliefentries=4 polygonreliefangle="90 Angle" airgapwidth=10
PolygonConnect PolygonConnect_components [(InComponentClass('All Components'))] p2: connectstyle=Relief reliefconductorwidth=15 reliefentries=4 polygonreliefangle="90 Angle" airgapwidth=10
PolygonConnect PolygonConnect_default [All] p3: connectstyle=Direct reliefconductorwidth=20 reliefentries=4 polygonreliefangle="90 Angle" airgapwidth=10
RoutingVias [All] p1: holewidth=10 width=19.4 viastyle="Through Hole" minholewidth=10 minwidth=18.6 maxholewidth=150 maxwidth=150
SilkToSilkClearance [All] p1: silktosilkclearance=0.2
SilkToSolderMaskClearance SilkscreenOverComponentPads [IsPad] p1: minsilkscreentomaskgap=3 clearancetoexposedcopper=TRUE
SolderMaskExpansion SolderMaskExpansion_std [All] p1: expansion=2 istentingtop=FALSE
Width [All] p1: maxlimit=100 minlimit=3.8 preferedwidth=3.8 toplayer_minwidth=5 toplayer_prefwidth=5 bottomlayer_minwidth=5 bottomlayer_prefwidth=5 minimp=50.000000 maximp=50.000000 favimp=50.000000
21 further rules are at their usual default settings.

## Classes and differential pairs
net class "Net Class 4": QDR1.A0 QDR1.A2 QDR1.A18 QDR1.A20 QDR1.D18 QDR1.D19 QDR1.D20 QDR1.D21 QDR1.D22 QDR1.D27 QDR1.D28 QDR1.D29 QDR1.D30 QDR1.Q18 QDR1.Q19 QDR1.Q20 QDR1.Q21 QDR1.Q22 QDR1.Q27 QDR1.Q28 QDR1.Q29 QDR1.Q30
net class "Net Class 3": QDR1.A4 QDR1.A7 QDR1.A8 QDR1.A12 QDR1.A13 QDR1.A14 QDR1.D23 QDR1.D24 QDR1.D25 QDR1.D26 QDR1.D31 QDR1.D32 QDR1.D33 QDR1.D34 QDR1.D35 QDR1.Q23 QDR1.Q24 QDR1.Q25 QDR1.Q26 QDR1.Q31 QDR1.Q32 QDR1.Q33 QDR1.Q34 QDR1.Q35
net class "Net Class 2": QDR1.A1 QDR1.A3 QDR1.A11 QDR1.A19 QDR1.D5 QDR1.D6 QDR1.D7 QDR1.D8 QDR1.D13 QDR1.D14 QDR1.D15 QDR1.D16 QDR1.D17 QDR1.Q5 QDR1.Q6 QDR1.Q7 QDR1.Q8 QDR1.Q13 QDR1.Q14 QDR1.Q15 QDR1.Q16 QDR1.Q17
net class "Net Class 1": QDR1.A5 QDR1.A6 QDR1.A9 QDR1.A10 QDR1.A15 QDR1.A16 QDR1.A17 QDR1.D0 QDR1.D1 QDR1.D2 QDR1.D3 QDR1.D4 QDR1.D9 QDR1.D10 QDR1.D11 QDR1.D12 QDR1.Q0 QDR1.Q1 QDR1.Q2 QDR1.Q3 QDR1.Q4 QDR1.Q9 QDR1.Q10 QDR1.Q11 QDR1.Q12
differential pair XAUI_CLK: +XAUI_CLK_P -XAUI_CLK_N
differential pair XAUI_CLKREF2: +XAUI_CLKREF2_P -XAUI_CLKREF2_N
differential pair XAUI_CLKREF1: +XAUI_CLKREF1_P -XAUI_CLKREF1_N
differential pair XAUI_CLKREF0: +XAUI_CLKREF0_P -XAUI_CLKREF0_N
differential pair XAUI_CLKAC2: +XAUI_CLKAC2_P -XAUI_CLKAC2_N
differential pair XAUI_CLKAC1: +XAUI_CLKAC1_P -XAUI_CLKAC1_N
differential pair XAUI_CLKAC0: +XAUI_CLKAC0_P -XAUI_CLKAC0_N
differential pair SGMII_RX_AC: +SGMII_RX_AC_P -SGMII_RX_AC_N
differential pair MGT_RX_AC31: +MGT_RX_AC31_P -MGT_RX_AC31_N
differential pair MGT_RX_AC30: +MGT_RX_AC30_P -MGT_RX_AC30_N
differential pair MGT_RX_AC29: +MGT_RX_AC29_P -MGT_RX_AC29_N
differential pair MGT_RX_AC28: +MGT_RX_AC28_P -MGT_RX_AC28_N
differential pair MGT_RX_AC27: +MGT_RX_AC27_P -MGT_RX_AC27_N
differential pair MGT_RX_AC26: +MGT_RX_AC26_P -MGT_RX_AC26_N
differential pair MGT_RX_AC25: +MGT_RX_AC25_P -MGT_RX_AC25_N
differential pair MGT_RX_AC24: +MGT_RX_AC24_P -MGT_RX_AC24_N
differential pair MGT_RX_AC23: +MGT_RX_AC23_P -MGT_RX_AC23_N
differential pair MGT_RX_AC22: +MGT_RX_AC22_P -MGT_RX_AC22_N
differential pair MGT_RX_AC21: +MGT_RX_AC21_P -MGT_RX_AC21_N
differential pair MGT_RX_AC20: +MGT_RX_AC20_P -MGT_RX_AC20_N
differential pair MGT_RX_AC19: +MGT_RX_AC19_P -MGT_RX_AC19_N
differential pair MGT_RX_AC18: +MGT_RX_AC18_P -MGT_RX_AC18_N
differential pair MGT_RX_AC17: +MGT_RX_AC17_P -MGT_RX_AC17_N
differential pair MGT_RX_AC16: +MGT_RX_AC16_P -MGT_RX_AC16_N
differential pair MGT_RX_AC15: +MGT_RX_AC15_P -MGT_RX_AC15_N
differential pair MGT_RX_AC14: +MGT_RX_AC14_P -MGT_RX_AC14_N
differential pair MGT_RX_AC13: +MGT_RX_AC13_P -MGT_RX_AC13_N
differential pair MGT_RX_AC12: +MGT_RX_AC12_P -MGT_RX_AC12_N
differential pair MGT_RX_AC11: +MGT_RX_AC11_P -MGT_RX_AC11_N
differential pair MGT_RX_AC10: +MGT_RX_AC10_P -MGT_RX_AC10_N
differential pair MGT_RX_AC9: +MGT_RX_AC9_P -MGT_RX_AC9_N
differential pair MGT_RX_AC8: +MGT_RX_AC8_P -MGT_RX_AC8_N
differential pair MGT_RX_AC7: +MGT_RX_AC7_P -MGT_RX_AC7_N
differential pair MGT_RX_AC6: +MGT_RX_AC6_P -MGT_RX_AC6_N
differential pair MGT_RX_AC5: +MGT_RX_AC5_P -MGT_RX_AC5_N
differential pair MGT_RX_AC4: +MGT_RX_AC4_P -MGT_RX_AC4_N
differential pair MGT_RX_AC3: +MGT_RX_AC3_P -MGT_RX_AC3_N
differential pair MGT_RX_AC2: +MGT_RX_AC2_P -MGT_RX_AC2_N
differential pair MGT_RX_AC1: +MGT_RX_AC1_P -MGT_RX_AC1_N
differential pair MGT_RX_AC0: +MGT_RX_AC0_P -MGT_RX_AC0_N
differential pair ZDOK1.DP0: +ZDOK1.DP_P0 -ZDOK1.DP_N0
differential pair ZDOK1.DP1: +ZDOK1.DP_P1 -ZDOK1.DP_N1
differential pair ZDOK1.DP2: +ZDOK1.DP_P2 -ZDOK1.DP_N2
differential pair ZDOK1.DP3: +ZDOK1.DP_P3 -ZDOK1.DP_N3
differential pair ZDOK1.DP4: +ZDOK1.DP_P4 -ZDOK1.DP_N4
differential pair ZDOK1.DP5: +ZDOK1.DP_P5 -ZDOK1.DP_N5
differential pair ZDOK1.DP6: +ZDOK1.DP_P6 -ZDOK1.DP_N6
differential pair ZDOK1.DP7: +ZDOK1.DP_P7 -ZDOK1.DP_N7
differential pair ZDOK1.DP8: +ZDOK1.DP_P8 -ZDOK1.DP_N8
differential pair ZDOK1.DP9: +ZDOK1.DP_P9 -ZDOK1.DP_N9
differential pair ZDOK1.DP10: +ZDOK1.DP_P10 -ZDOK1.DP_N10
differential pair ZDOK1.DP11: +ZDOK1.DP_P11 -ZDOK1.DP_N11
differential pair ZDOK1.DP12: +ZDOK1.DP_P12 -ZDOK1.DP_N12
differential pair ZDOK1.DP13: +ZDOK1.DP_P13 -ZDOK1.DP_N13
differential pair ZDOK1.DP14: +ZDOK1.DP_P14 -ZDOK1.DP_N14
differential pair ZDOK1.DP15: +ZDOK1.DP_P15 -ZDOK1.DP_N15
differential pair ZDOK1.DP16: +ZDOK1.DP_P16 -ZDOK1.DP_N16
differential pair ZDOK1.DP17: +ZDOK1.DP_P17 -ZDOK1.DP_N17
differential pair ZDOK1.DP18: +ZDOK1.DP_P18 -ZDOK1.DP_N18
differential pair ZDOK1.DP19: +ZDOK1.DP_P19 -ZDOK1.DP_N19
differential pair ZDOK1.DP20: +ZDOK1.DP_P20 -ZDOK1.DP_N20
differential pair ZDOK1.DP21: +ZDOK1.DP_P21 -ZDOK1.DP_N21
differential pair ZDOK1.DP22: +ZDOK1.DP_P22 -ZDOK1.DP_N22
differential pair ZDOK1.DP23: +ZDOK1.DP_P23 -ZDOK1.DP_N23
differential pair ZDOK1.DP24: +ZDOK1.DP_P24 -ZDOK1.DP_N24
differential pair ZDOK1.DP25: +ZDOK1.DP_P25 -ZDOK1.DP_N25
differential pair ZDOK1.DP26: +ZDOK1.DP_P26 -ZDOK1.DP_N26
differential pair ZDOK1.DP27: +ZDOK1.DP_P27 -ZDOK1.DP_N27
differential pair ZDOK1.DP28: +ZDOK1.DP_P28 -ZDOK1.DP_N28
differential pair ZDOK1.DP29: +ZDOK1.DP_P29 -ZDOK1.DP_N29
differential pair ZDOK1.DP30: +ZDOK1.DP_P30 -ZDOK1.DP_N30
differential pair ZDOK1.DP31: +ZDOK1.DP_P31 -ZDOK1.DP_N31
differential pair ZDOK1.DP32: +ZDOK1.DP_P32 -ZDOK1.DP_N32
differential pair ZDOK1.DP33: +ZDOK1.DP_P33 -ZDOK1.DP_N33
differential pair ZDOK1.DP34: +ZDOK1.DP_P34 -ZDOK1.DP_N34
differential pair ZDOK1.DP35: +ZDOK1.DP_P35 -ZDOK1.DP_N35
differential pair ZDOK1.DP36: +ZDOK1.DP_P36 -ZDOK1.DP_N36
differential pair ZDOK1.DP37: +ZDOK1.DP_P37 -ZDOK1.DP_N37
differential pair AUX_CLK: +AUX_CLK_P -AUX_CLK_N
differential pair AUX_SYNCI: +AUX_SYNCI_P -AUX_SYNCI_N
differential pair AUX_SYNCO: +AUX_SYNCO_P -AUX_SYNCO_N
differential pair DDR2.CLK0: +DDR2.CLK_P0 -DDR2.CLK_N0
differential pair DDR2.CLK1: +DDR2.CLK_P1 -DDR2.CLK_N1
differential pair DDR2.CLK2: +DDR2.CLK_P2 -DDR2.CLK_N2
differential pair DDR2.CLK3: +DDR2.CLK_P3 -DDR2.CLK_N3
differential pair DDR2.CLKOUTR: +DDR2.CLKOUTR_P -DDR2.CLKOUTR_N
differential pair DDR2.CLKOUT: +DDR2.CLKOUT_P -DDR2.CLKOUT_N
differential pair DDR3.CK: +DDR3.CK_P -DDR3.CK_N
differential pair DDR3.DQS0: +DDR3.DQS_P0 -DDR3.DQS_N0
differential pair DDR3.DQS1: +DDR3.DQS_P1 -DDR3.DQS_N1
differential pair DDR3.DQS2: +DDR3.DQS_P2 -DDR3.DQS_N2
differential pair DDR3.DQS3: +DDR3.DQS_P3 -DDR3.DQS_N3
differential pair DDR3.DQS4: +DDR3.DQS_P4 -DDR3.DQS_N4
differential pair DDR3.DQS5: +DDR3.DQS_P5 -DDR3.DQS_N5
differential pair DDR3.DQS6: +DDR3.DQS_P6 -DDR3.DQS_N6
differential pair DDR3.DQS7: +DDR3.DQS_P7 -DDR3.DQS_N7
differential pair DDR3.DQS8: +DDR3.DQS_P8 -DDR3.DQS_N8
differential pair FTDI_USBD: +FTDI_USBD_P -FTDI_USBD_N
differential pair PPC_THERM: +PPC_THERM_P -PPC_THERM_N
differential pair PPC_USBD: +PPC_USBD_P -PPC_USBD_N
differential pair PPCMDI_0: +PPCMDI_0_P -PPCMDI_0_N
differential pair PPCMDI_1: +PPCMDI_1_P -PPCMDI_1_N
differential pair PPCMDI_2: +PPCMDI_2_P -PPCMDI_2_N
differential pair PPCMDI_3: +PPCMDI_3_P -PPCMDI_3_N
differential pair SYS_CLK: +SYS_CLK_P -SYS_CLK_N
differential pair V6_THERM: +V6_THERM_P -V6_THERM_N
differential pair V6MDI_0: +V6MDI_0_P -V6MDI_0_N
differential pair V6MDI_1: +V6MDI_1_P -V6MDI_1_N
differential pair V6MDI_2: +V6MDI_2_P -V6MDI_2_N
differential pair V6MDI_3: +V6MDI_3_P -V6MDI_3_N
differential pair ZDOK0.CLK0: +ZDOK0.CLK0_P -ZDOK0.CLK0_N
differential pair ZDOK0.CLK1: +ZDOK0.CLK1_P -ZDOK0.CLK1_N
differential pair ZDOK0.DP0: +ZDOK0.DP_P0 -ZDOK0.DP_N0
differential pair ZDOK0.DP1: +ZDOK0.DP_P1 -ZDOK0.DP_N1
differential pair ZDOK0.DP2: +ZDOK0.DP_P2 -ZDOK0.DP_N2
differential pair ZDOK0.DP3: +ZDOK0.DP_P3 -ZDOK0.DP_N3
differential pair ZDOK0.DP4: +ZDOK0.DP_P4 -ZDOK0.DP_N4
differential pair ZDOK0.DP5: +ZDOK0.DP_P5 -ZDOK0.DP_N5
differential pair ZDOK0.DP6: +ZDOK0.DP_P6 -ZDOK0.DP_N6
differential pair ZDOK0.DP7: +ZDOK0.DP_P7 -ZDOK0.DP_N7
differential pair ZDOK0.DP8: +ZDOK0.DP_P8 -ZDOK0.DP_N8
differential pair ZDOK0.DP9: +ZDOK0.DP_P9 -ZDOK0.DP_N9
differential pair ZDOK0.DP10: +ZDOK0.DP_P10 -ZDOK0.DP_N10
differential pair ZDOK0.DP11: +ZDOK0.DP_P11 -ZDOK0.DP_N11
differential pair ZDOK0.DP12: +ZDOK0.DP_P12 -ZDOK0.DP_N12
differential pair ZDOK0.DP13: +ZDOK0.DP_P13 -ZDOK0.DP_N13
differential pair ZDOK0.DP14: +ZDOK0.DP_P14 -ZDOK0.DP_N14
differential pair ZDOK0.DP15: +ZDOK0.DP_P15 -ZDOK0.DP_N15
differential pair ZDOK0.DP16: +ZDOK0.DP_P16 -ZDOK0.DP_N16
differential pair ZDOK0.DP17: +ZDOK0.DP_P17 -ZDOK0.DP_N17
differential pair ZDOK0.DP18: +ZDOK0.DP_P18 -ZDOK0.DP_N18
differential pair ZDOK0.DP19: +ZDOK0.DP_P19 -ZDOK0.DP_N19
differential pair ZDOK0.DP20: +ZDOK0.DP_P20 -ZDOK0.DP_N20
differential pair ZDOK0.DP21: +ZDOK0.DP_P21 -ZDOK0.DP_N21
differential pair ZDOK0.DP22: +ZDOK0.DP_P22 -ZDOK0.DP_N22
differential pair ZDOK0.DP23: +ZDOK0.DP_P23 -ZDOK0.DP_N23
differential pair ZDOK0.DP24: +ZDOK0.DP_P24 -ZDOK0.DP_N24
differential pair ZDOK0.DP25: +ZDOK0.DP_P25 -ZDOK0.DP_N25
differential pair ZDOK0.DP26: +ZDOK0.DP_P26 -ZDOK0.DP_N26
differential pair ZDOK0.DP27: +ZDOK0.DP_P27 -ZDOK0.DP_N27
differential pair ZDOK0.DP28: +ZDOK0.DP_P28 -ZDOK0.DP_N28
differential pair ZDOK0.DP29: +ZDOK0.DP_P29 -ZDOK0.DP_N29
differential pair ZDOK0.DP30: +ZDOK0.DP_P30 -ZDOK0.DP_N30
differential pair ZDOK0.DP31: +ZDOK0.DP_P31 -ZDOK0.DP_N31
differential pair ZDOK0.DP32: +ZDOK0.DP_P32 -ZDOK0.DP_N32
differential pair ZDOK0.DP33: +ZDOK0.DP_P33 -ZDOK0.DP_N33
differential pair ZDOK0.DP34: +ZDOK0.DP_P34 -ZDOK0.DP_N34
differential pair ZDOK0.DP35: +ZDOK0.DP_P35 -ZDOK0.DP_N35
differential pair ZDOK0.DP36: +ZDOK0.DP_P36 -ZDOK0.DP_N36
differential pair ZDOK0.DP37: +ZDOK0.DP_P37 -ZDOK0.DP_N37
differential pair ZDOK1.CLK0: +ZDOK1.CLK0_P -ZDOK1.CLK0_N
differential pair ZDOK1.CLK1: +ZDOK1.CLK1_P -ZDOK1.CLK1_N
differential pair EXT_REFCLK0: +EXT_REFCLK_P0 -EXT_REFCLK_N0
differential pair EXT_REFCLK1: +EXT_REFCLK_P1 -EXT_REFCLK_N1
differential pair EXT_REFCLK2: +EXT_REFCLK_P2 -EXT_REFCLK_N2
differential pair EXT_REFCLK3: +EXT_REFCLK_P3 -EXT_REFCLK_N3
differential pair EXT_REFCLK4: +EXT_REFCLK_P4 -EXT_REFCLK_N4
differential pair EXT_REFCLK5: +EXT_REFCLK_P5 -EXT_REFCLK_N5
differential pair EXT_REFCLK6: +EXT_REFCLK_P6 -EXT_REFCLK_N6
differential pair EXT_REFCLK7: +EXT_REFCLK_P7 -EXT_REFCLK_N7
differential pair MGT_RX0: +MGT_RX_P0 -MGT_RX_N0
differential pair MGT_RX1: +MGT_RX_P1 -MGT_RX_N1
differential pair MGT_RX2: +MGT_RX_P2 -MGT_RX_N2
differential pair MGT_RX3: +MGT_RX_P3 -MGT_RX_N3
differential pair MGT_RX4: +MGT_RX_P4 -MGT_RX_N4
differential pair MGT_RX5: +MGT_RX_P5 -MGT_RX_N5
differential pair MGT_RX6: +MGT_RX_P6 -MGT_RX_N6
differential pair MGT_RX7: +MGT_RX_P7 -MGT_RX_N7
differential pair MGT_RX8: +MGT_RX_P8 -MGT_RX_N8
differential pair MGT_RX9: +MGT_RX_P9 -MGT_RX_N9
differential pair MGT_RX10: +MGT_RX_P10 -MGT_RX_N10
differential pair MGT_RX11: +MGT_RX_P11 -MGT_RX_N11
differential pair MGT_RX12: +MGT_RX_P12 -MGT_RX_N12
differential pair MGT_RX13: +MGT_RX_P13 -MGT_RX_N13
differential pair MGT_RX14: +MGT_RX_P14 -MGT_RX_N14
differential pair MGT_RX15: +MGT_RX_P15 -MGT_RX_N15
differential pair MGT_RX16: +MGT_RX_P16 -MGT_RX_N16
differential pair MGT_RX17: +MGT_RX_P17 -MGT_RX_N17
differential pair MGT_RX18: +MGT_RX_P18 -MGT_RX_N18
differential pair MGT_RX19: +MGT_RX_P19 -MGT_RX_N19
differential pair MGT_RX20: +MGT_RX_P20 -MGT_RX_N20
differential pair MGT_RX21: +MGT_RX_P21 -MGT_RX_N21
differential pair MGT_RX22: +MGT_RX_P22 -MGT_RX_N22
differential pair MGT_RX23: +MGT_RX_P23 -MGT_RX_N23
differential pair MGT_RX24: +MGT_RX_P24 -MGT_RX_N24
differential pair MGT_RX25: +MGT_RX_P25 -MGT_RX_N25
differential pair MGT_RX26: +MGT_RX_P26 -MGT_RX_N26
differential pair MGT_RX27: +MGT_RX_P27 -MGT_RX_N27
differential pair MGT_RX28: +MGT_RX_P28 -MGT_RX_N28
differential pair MGT_RX29: +MGT_RX_P29 -MGT_RX_N29
differential pair MGT_RX30: +MGT_RX_P30 -MGT_RX_N30
differential pair MGT_RX31: +MGT_RX_P31 -MGT_RX_N31
differential pair MGT_TX0: +MGT_TX_P0 -MGT_TX_N0
differential pair MGT_TX1: +MGT_TX_P1 -MGT_TX_N1
differential pair MGT_TX2: +MGT_TX_P2 -MGT_TX_N2
differential pair MGT_TX3: +MGT_TX_P3 -MGT_TX_N3
differential pair MGT_TX4: +MGT_TX_P4 -MGT_TX_N4
differential pair MGT_TX5: +MGT_TX_P5 -MGT_TX_N5
differential pair MGT_TX6: +MGT_TX_P6 -MGT_TX_N6
differential pair MGT_TX7: +MGT_TX_P7 -MGT_TX_N7
differential pair MGT_TX8: +MGT_TX_P8 -MGT_TX_N8
differential pair MGT_TX9: +MGT_TX_P9 -MGT_TX_N9
differential pair MGT_TX10: +MGT_TX_P10 -MGT_TX_N10
differential pair MGT_TX11: +MGT_TX_P11 -MGT_TX_N11
differential pair MGT_TX12: +MGT_TX_P12 -MGT_TX_N12
differential pair MGT_TX13: +MGT_TX_P13 -MGT_TX_N13
differential pair MGT_TX14: +MGT_TX_P14 -MGT_TX_N14
differential pair MGT_TX15: +MGT_TX_P15 -MGT_TX_N15
differential pair MGT_TX16: +MGT_TX_P16 -MGT_TX_N16
differential pair MGT_TX17: +MGT_TX_P17 -MGT_TX_N17
differential pair MGT_TX18: +MGT_TX_P18 -MGT_TX_N18
differential pair MGT_TX19: +MGT_TX_P19 -MGT_TX_N19
differential pair MGT_TX20: +MGT_TX_P20 -MGT_TX_N20
differential pair MGT_TX21: +MGT_TX_P21 -MGT_TX_N21
differential pair MGT_TX22: +MGT_TX_P22 -MGT_TX_N22
differential pair MGT_TX23: +MGT_TX_P23 -MGT_TX_N23
differential pair MGT_TX24: +MGT_TX_P24 -MGT_TX_N24
differential pair MGT_TX25: +MGT_TX_P25 -MGT_TX_N25
differential pair MGT_TX26: +MGT_TX_P26 -MGT_TX_N26
differential pair MGT_TX27: +MGT_TX_P27 -MGT_TX_N27
differential pair MGT_TX28: +MGT_TX_P28 -MGT_TX_N28
differential pair MGT_TX29: +MGT_TX_P29 -MGT_TX_N29
differential pair MGT_TX30: +MGT_TX_P30 -MGT_TX_N30
differential pair MGT_TX31: +MGT_TX_P31 -MGT_TX_N31
differential pair SGMII_RX: +SGMII_RX_P -SGMII_RX_N
differential pair SGMII_TX: +SGMII_TX_P -SGMII_TX_N
differential pair SGMII_CLKAC: +SGMII_CLKAC_P -SGMII_CLKAC_N
differential pair SGMII_ACTX: +SGMII_ACTX_P -SGMII_ACTX_N

## Components (designator, comment, footprint, x,y, rotation, side; value= is the part's Value field where it differs from the comment)
U1 "CY7C2565KV18" FBGA_165-Ball 560.12,1489.33 r180 top locked (schematic designator U58)
U2 "CY7C2565KV18" FBGA_165-Ball 565.39,626.81 r180 top locked (schematic designator U57)
U4 "MT47H128M16" DDR2_BGA84 1191.06,691.65 r0 top locked (schematic designator U43)
U5 "XC6VSX475T-1FFG1759C" FFG1759 2492.24,1119.37 r90 top locked (schematic designator U1)

## Footprints (in the part's own frame and the unit in brackets; to place one, negate y for a bottom-side part, rotate by r counter-clockwise, add the part's x,y. Pads: shape width x height; smd on the part's side, far side on the other; paste and mask are expansions set on the pad)
DDR2_BGA84 [mm] "84-Lead DDR2 BGA, Body 14.0x11.5mm,  Pitch 0.80mm"
  round 0.45 smd: A1(-3.2,5.6) A2(-2.4,5.6) A3(-1.6,5.6) A7(1.6,5.6) A8(2.4,5.6) A9(3.2,5.6) B1(-3.2,4.8) B2(-2.4,4.8) B3(-1.6,4.8) B7(1.6,4.8) B8(2.4,4.8) B9(3.2,4.8) C1(-3.2,4) C2(-2.4,4) C3(-1.6,4) C7(1.6,4) C8(2.4,4) C9(3.2,4) D1(-3.2,3.2) D2(-2.4,3.2) D3(-1.6,3.2) D7(1.6,3.2) D8(2.4,3.2) D9(3.2,3.2) E1(-3.2,2.4) E2(-2.4,2.4) E3(-1.6,2.4) E7(1.6,2.4) E8(2.4,2.4) E9(3.2,2.4) F1(-3.2,1.6) F2(-2.4,1.6) F3(-1.6,1.6) F7(1.6,1.6) F8(2.4,1.6) F9(3.2,1.6) G1(-3.2,0.8) G2(-2.4,0.8) G3(-1.6,0.8) G7(1.6,0.8) G8(2.4,0.8) G9(3.2,0.8) H1(-3.2,0) H2(-2.4,0) H3(-1.6,0) H7(1.6,0) H8(2.4,0) H9(3.2,0) J1(-3.2,-0.8) J2(-2.4,-0.8) J3(-1.6,-0.8) J7(1.6,-0.8) J8(2.4,-0.8) J9(3.2,-0.8) K2(-2.4,-1.6) K3(-1.6,-1.6) K7(1.6,-1.6) K8(2.4,-1.6) K9(3.2,-1.6) L1(-3.2,-2.4) L2(-2.4,-2.4) L3(-1.6,-2.4) L7(1.6,-2.4) L8(2.4,-2.4) M2(-2.4,-3.2) M3(-1.6,-3.2) M7(1.6,-3.2) M8(2.4,-3.2) M9(3.2,-3.2) N1(-3.2,-4) N2(-2.4,-4) N3(-1.6,-4) N7(1.6,-4) N8(2.4,-4) P2(-2.4,-4.8) P3(-1.6,-4.8) P7(1.6,-4.8) P8(2.4,-4.8) P9(3.2,-4.8) R1(-3.2,-5.6) R2(-2.4,-5.6) R3(-1.6,-5.6) R7(1.6,-5.6) R8(2.4,-5.6)
  silkscreen extent -5.75,-7 5.75,7, body extent -5.75,-7 5.75,7, height 0.9
FBGA_165-Ball [mm] "Fortified Ball Grid Array, 17.0 x 15.0mm, Pitch 1.0mm"
  round 0.45 smd: A1(-5,7) A2(-4,7) A3(-3,7) A4(-2,7) A5(-1,7) A6(0,7) A7(1,7) A8(2,7) A9(3,7) A10(4,7) A11(5,7) B1(-5,6) B2(-4,6) B3(-3,6) B4(-2,6) B5(-1,6) B6(0,6) B7(1,6) B8(2,6) B9(3,6) B10(4,6) B11(5,6) C1(-5,5) C2(-4,5) C3(-3,5) C4(-2,5) C5(-1,5) C6(0,5) C7(1,5) C8(2,5) C9(3,5) C10(4,5) C11(5,5) D1(-5,4) D2(-4,4) D3(-3,4) D4(-2,4) D5(-1,4) D6(0,4) D7(1,4) D8(2,4) D9(3,4) D10(4,4) D11(5,4) E1(-5,3) E2(-4,3) E3(-3,3) E4(-2,3) E5(-1,3) E6(0,3) E7(1,3) E8(2,3) E9(3,3) E10(4,3) E11(5,3) F1(-5,2) F2(-4,2) F3(-3,2) F4(-2,2) F5(-1,2) F6(0,2) F7(1,2) F8(2,2) F9(3,2) F10(4,2) F11(5,2) G1(-5,1) G2(-4,1) G3(-3,1) G4(-2,1) G5(-1,1) G6(0,1) G7(1,1) G8(2,1) G9(3,1) G10(4,1) G11(5,1) H1(-5,0) H2(-4,0) H3(-3,0) H4(-2,0) H5(-1,0) H6(0,0) H7(1,0) H8(2,0) H9(3,0) H10(4,0) H11(5,0) J1(-5,-1) J2(-4,-1) J3(-3,-1) J4(-2,-1) J5(-1,-1) J6(0,-1) J7(1,-1) J8(2,-1) J9(3,-1) J10(4,-1) J11(5,-1) K1(-5,-2) K2(-4,-2) K3(-3,-2) K4(-2,-2) K5(-1,-2) K6(0,-2) K7(1,-2) K8(2,-2) K9(3,-2) K10(4,-2) K11(5,-2) L1(-5,-3) L2(-4,-3) L3(-3,-3) L4(-2,-3) L5(-1,-3) L6(0,-3) L7(1,-3) L8(2,-3) L9(3,-3) L10(4,-3) L11(5,-3) M1(-5,-4) M2(-4,-4) M3(-3,-4) M4(-2,-4) M5(-1,-4) M6(0,-4) M7(1,-4) M8(2,-4) M9(3,-4) M10(4,-4) M11(5,-4) N1(-5,-5) N2(-4,-5) N3(-3,-5) N4(-2,-5) N5(-1,-5) N6(0,-5) N7(1,-5) N8(2,-5) N9(3,-5) N10(4,-5) N11(5,-5) P1(-5,-6) P2(-4,-6) P3(-3,-6) P4(-2,-6) P5(-1,-6) P6(0,-6) P7(1,-6) P8(2,-6) P9(3,-6) P10(4,-6) P11(5,-6) R1(-5,-7) R2(-4,-7) R3(-3,-7) R4(-2,-7) R5(-1,-7) R6(0,-7) R7(1,-7) R8(2,-7) R9(3,-7) R10(4,-7) R11(5,-7)
  silkscreen extent -7.5,-8.52 7.5,8.5, body extent -7.5,-8.5 7.5,8.5, height 1.4